# Altium PCB ALTAIR_PD_Squad_V26.5a.PcbDoc (part 1 of 3)
Units mm, origin at the board's own origin, x right, y up, seen from the top; angles counter-clockwise.
Board outline 65 x 52 mm, 4 copper layers (Top Layer, Layer 2, Layer 3, Bottom Layer), stack 1.818 mm thick; 171 components, 122 nets, 540 pads, 371 vias.
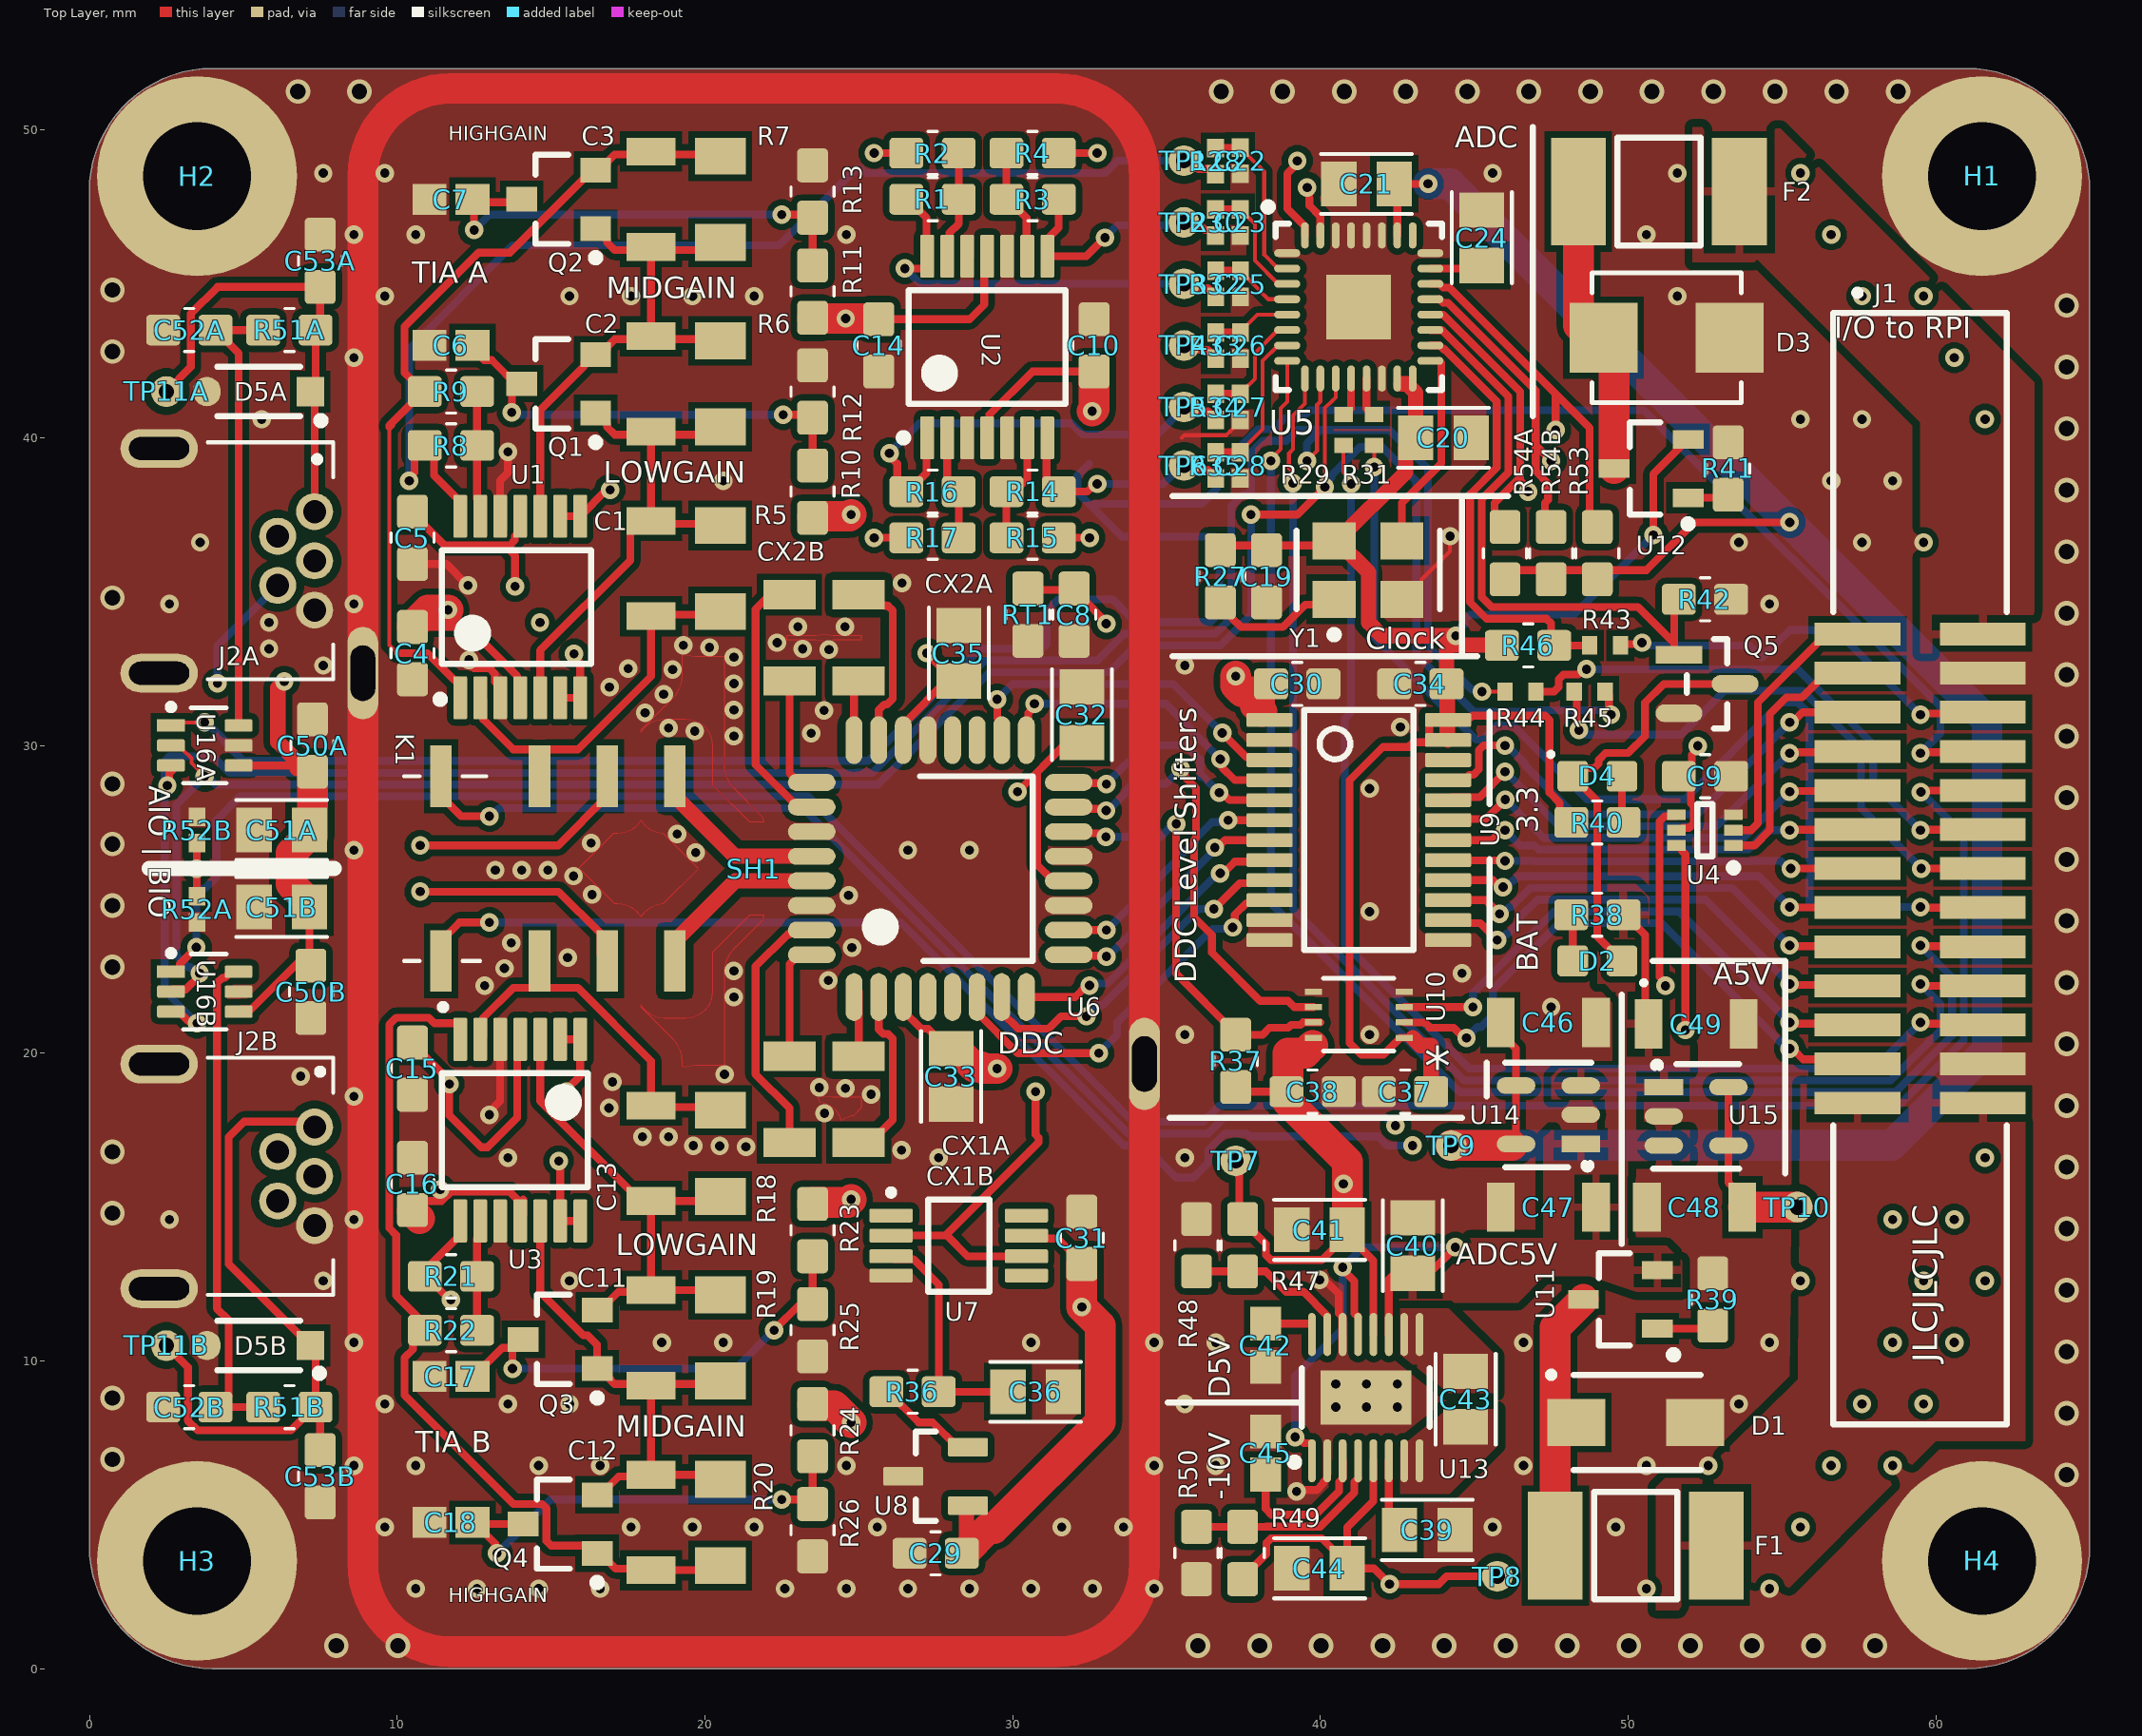
[diagram p0: Top Layer view]
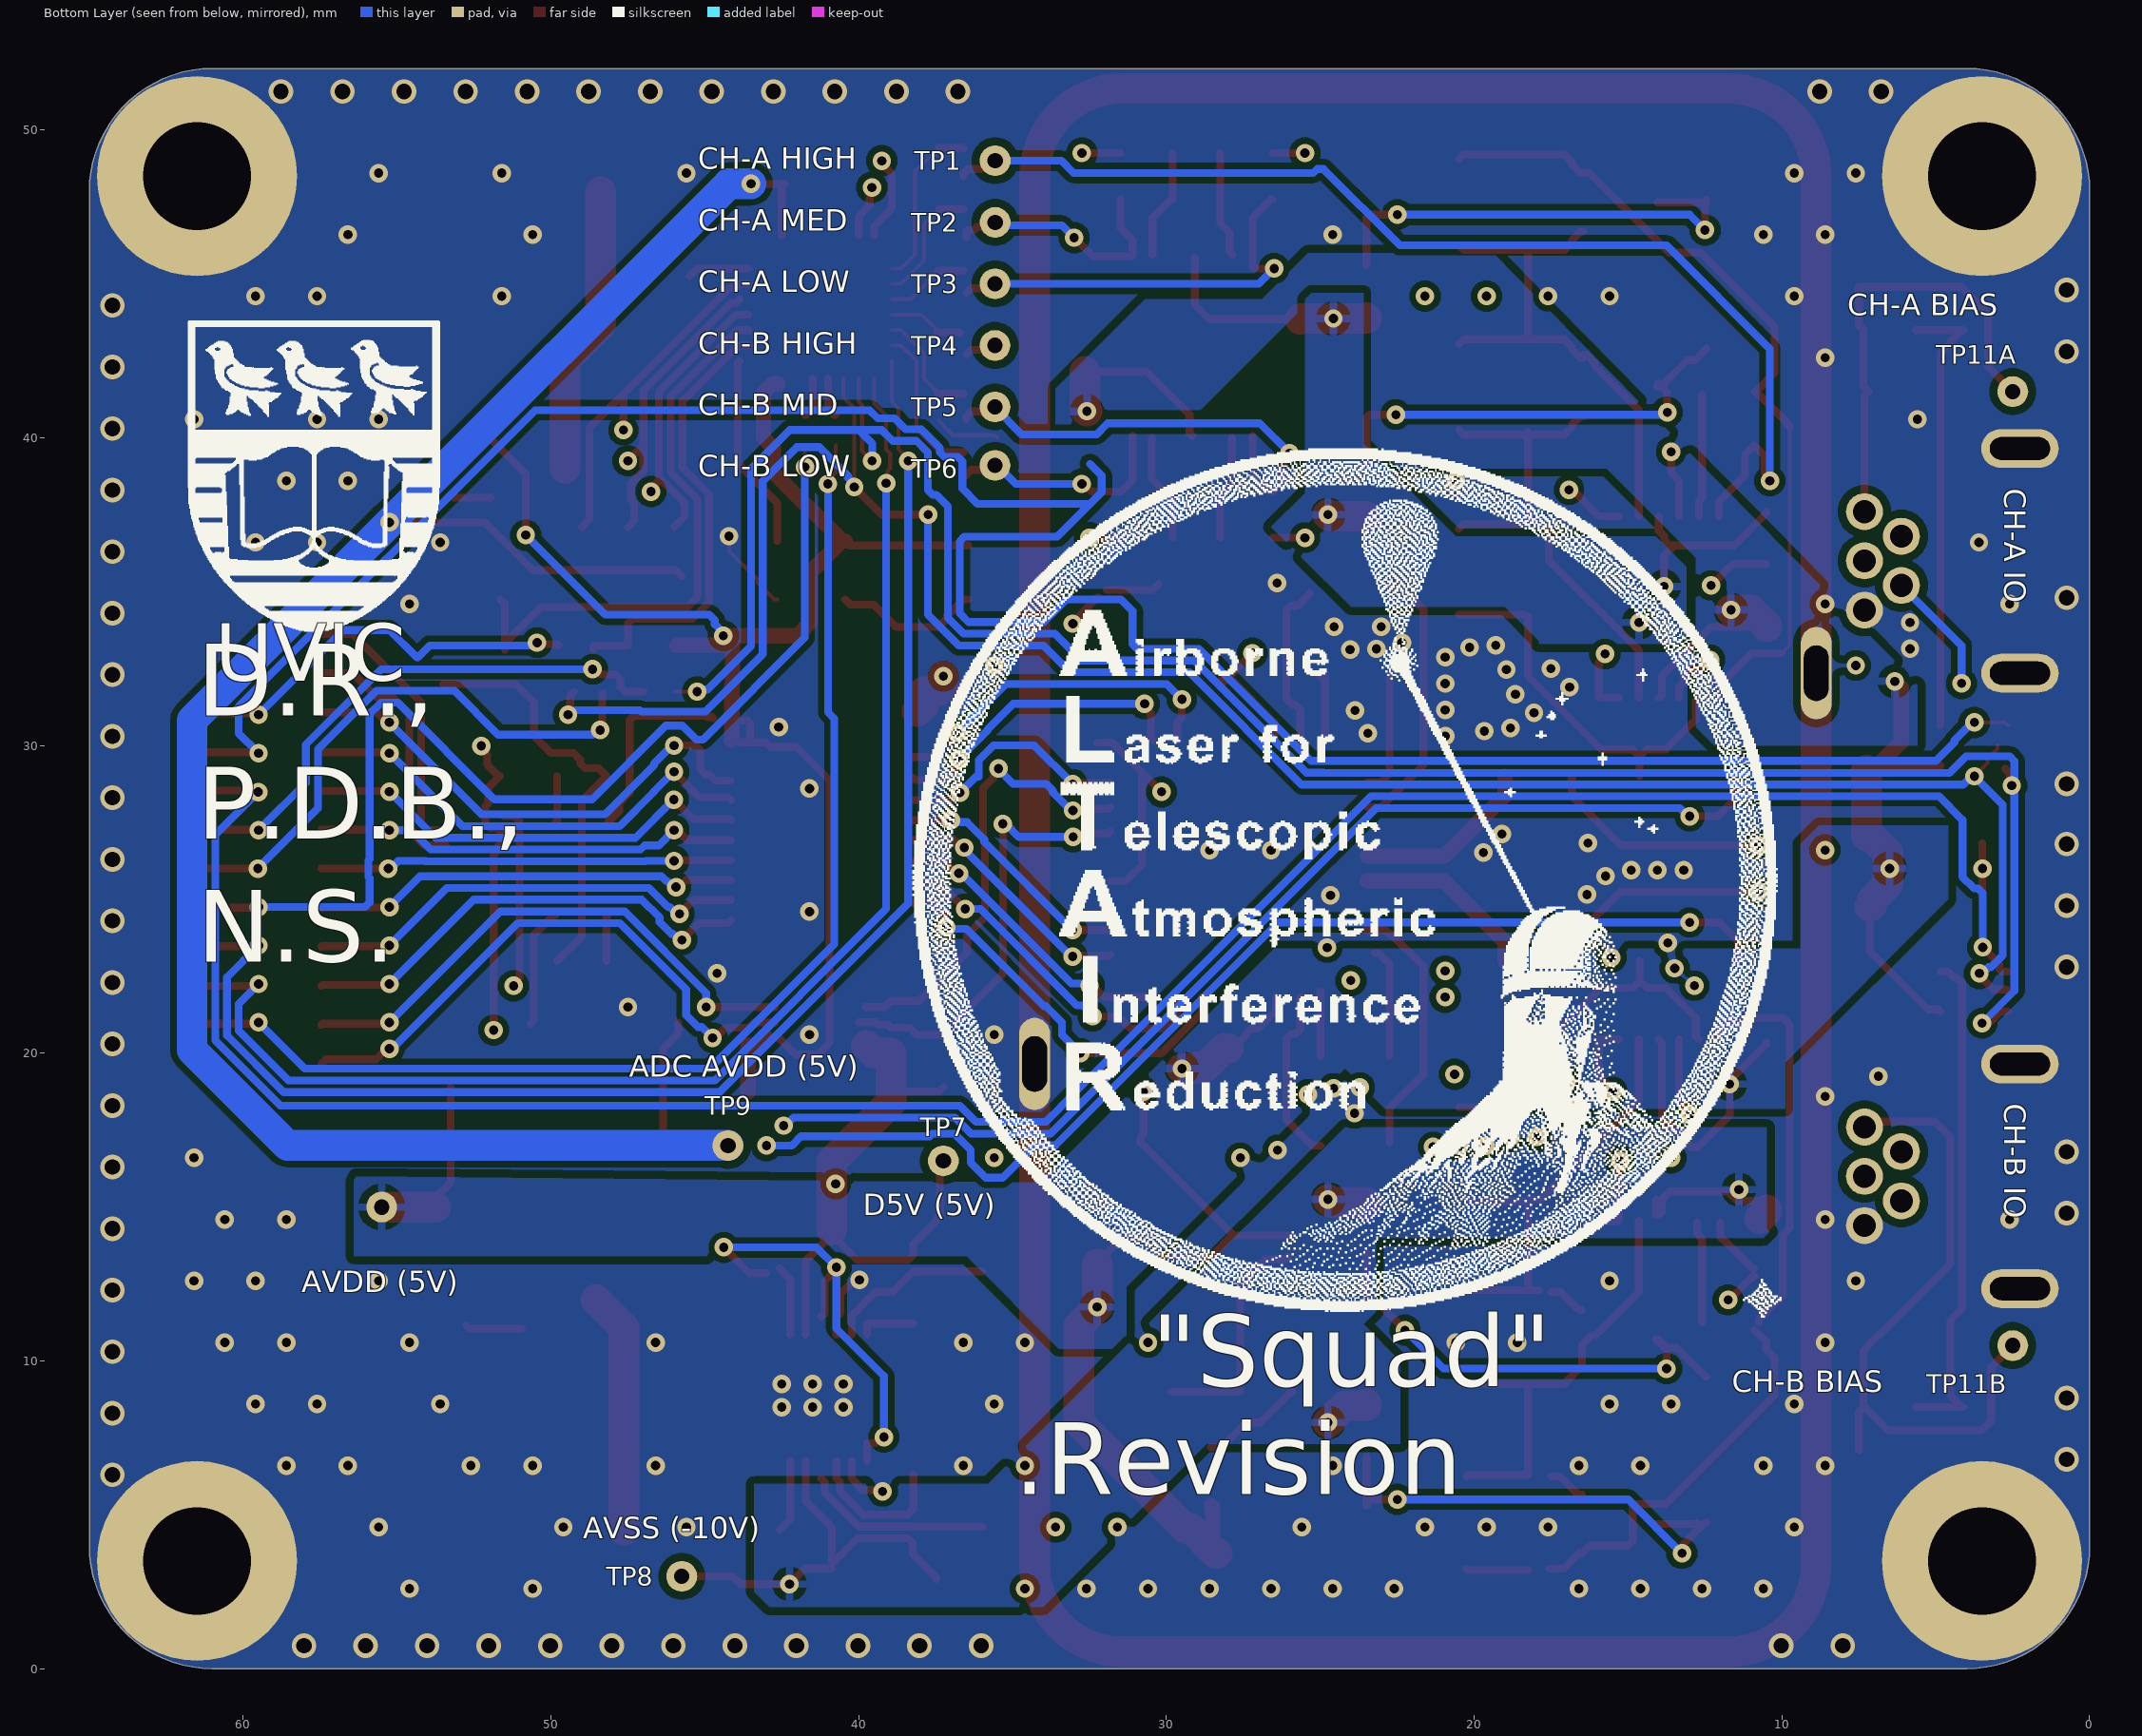
[diagram p1: Bottom Layer view, seen from below]
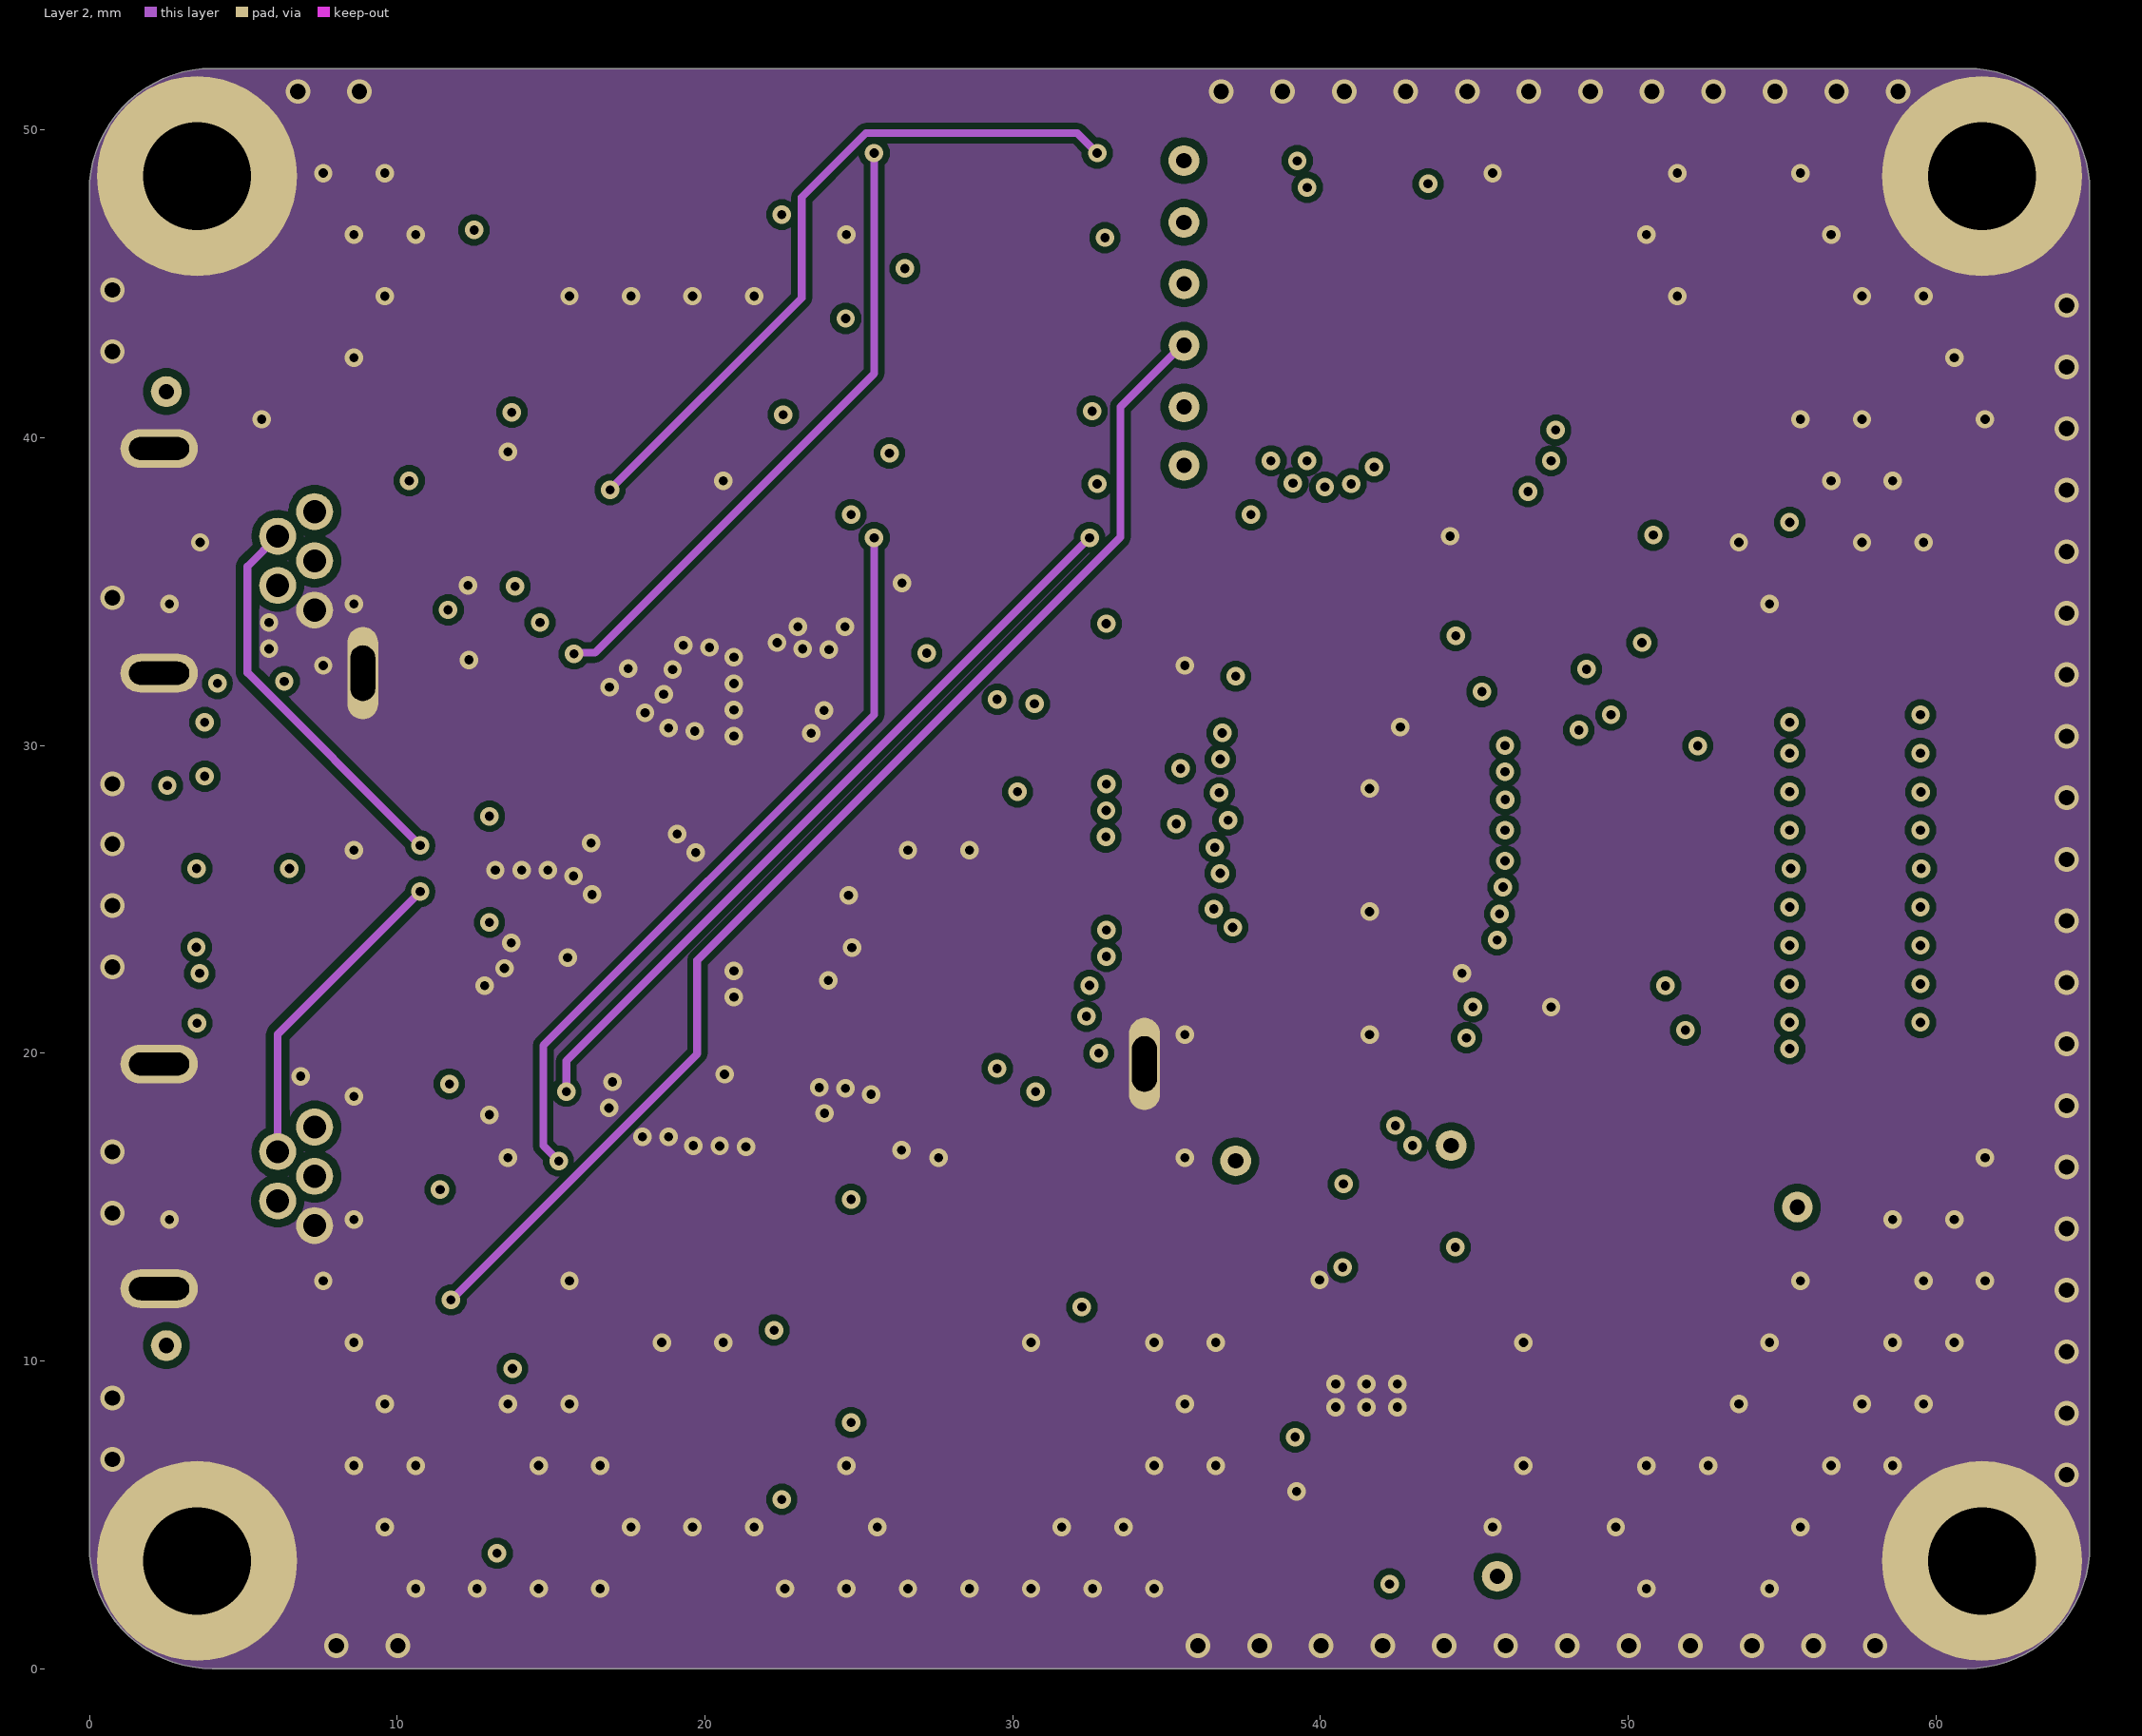
[diagram p2: Layer 2]
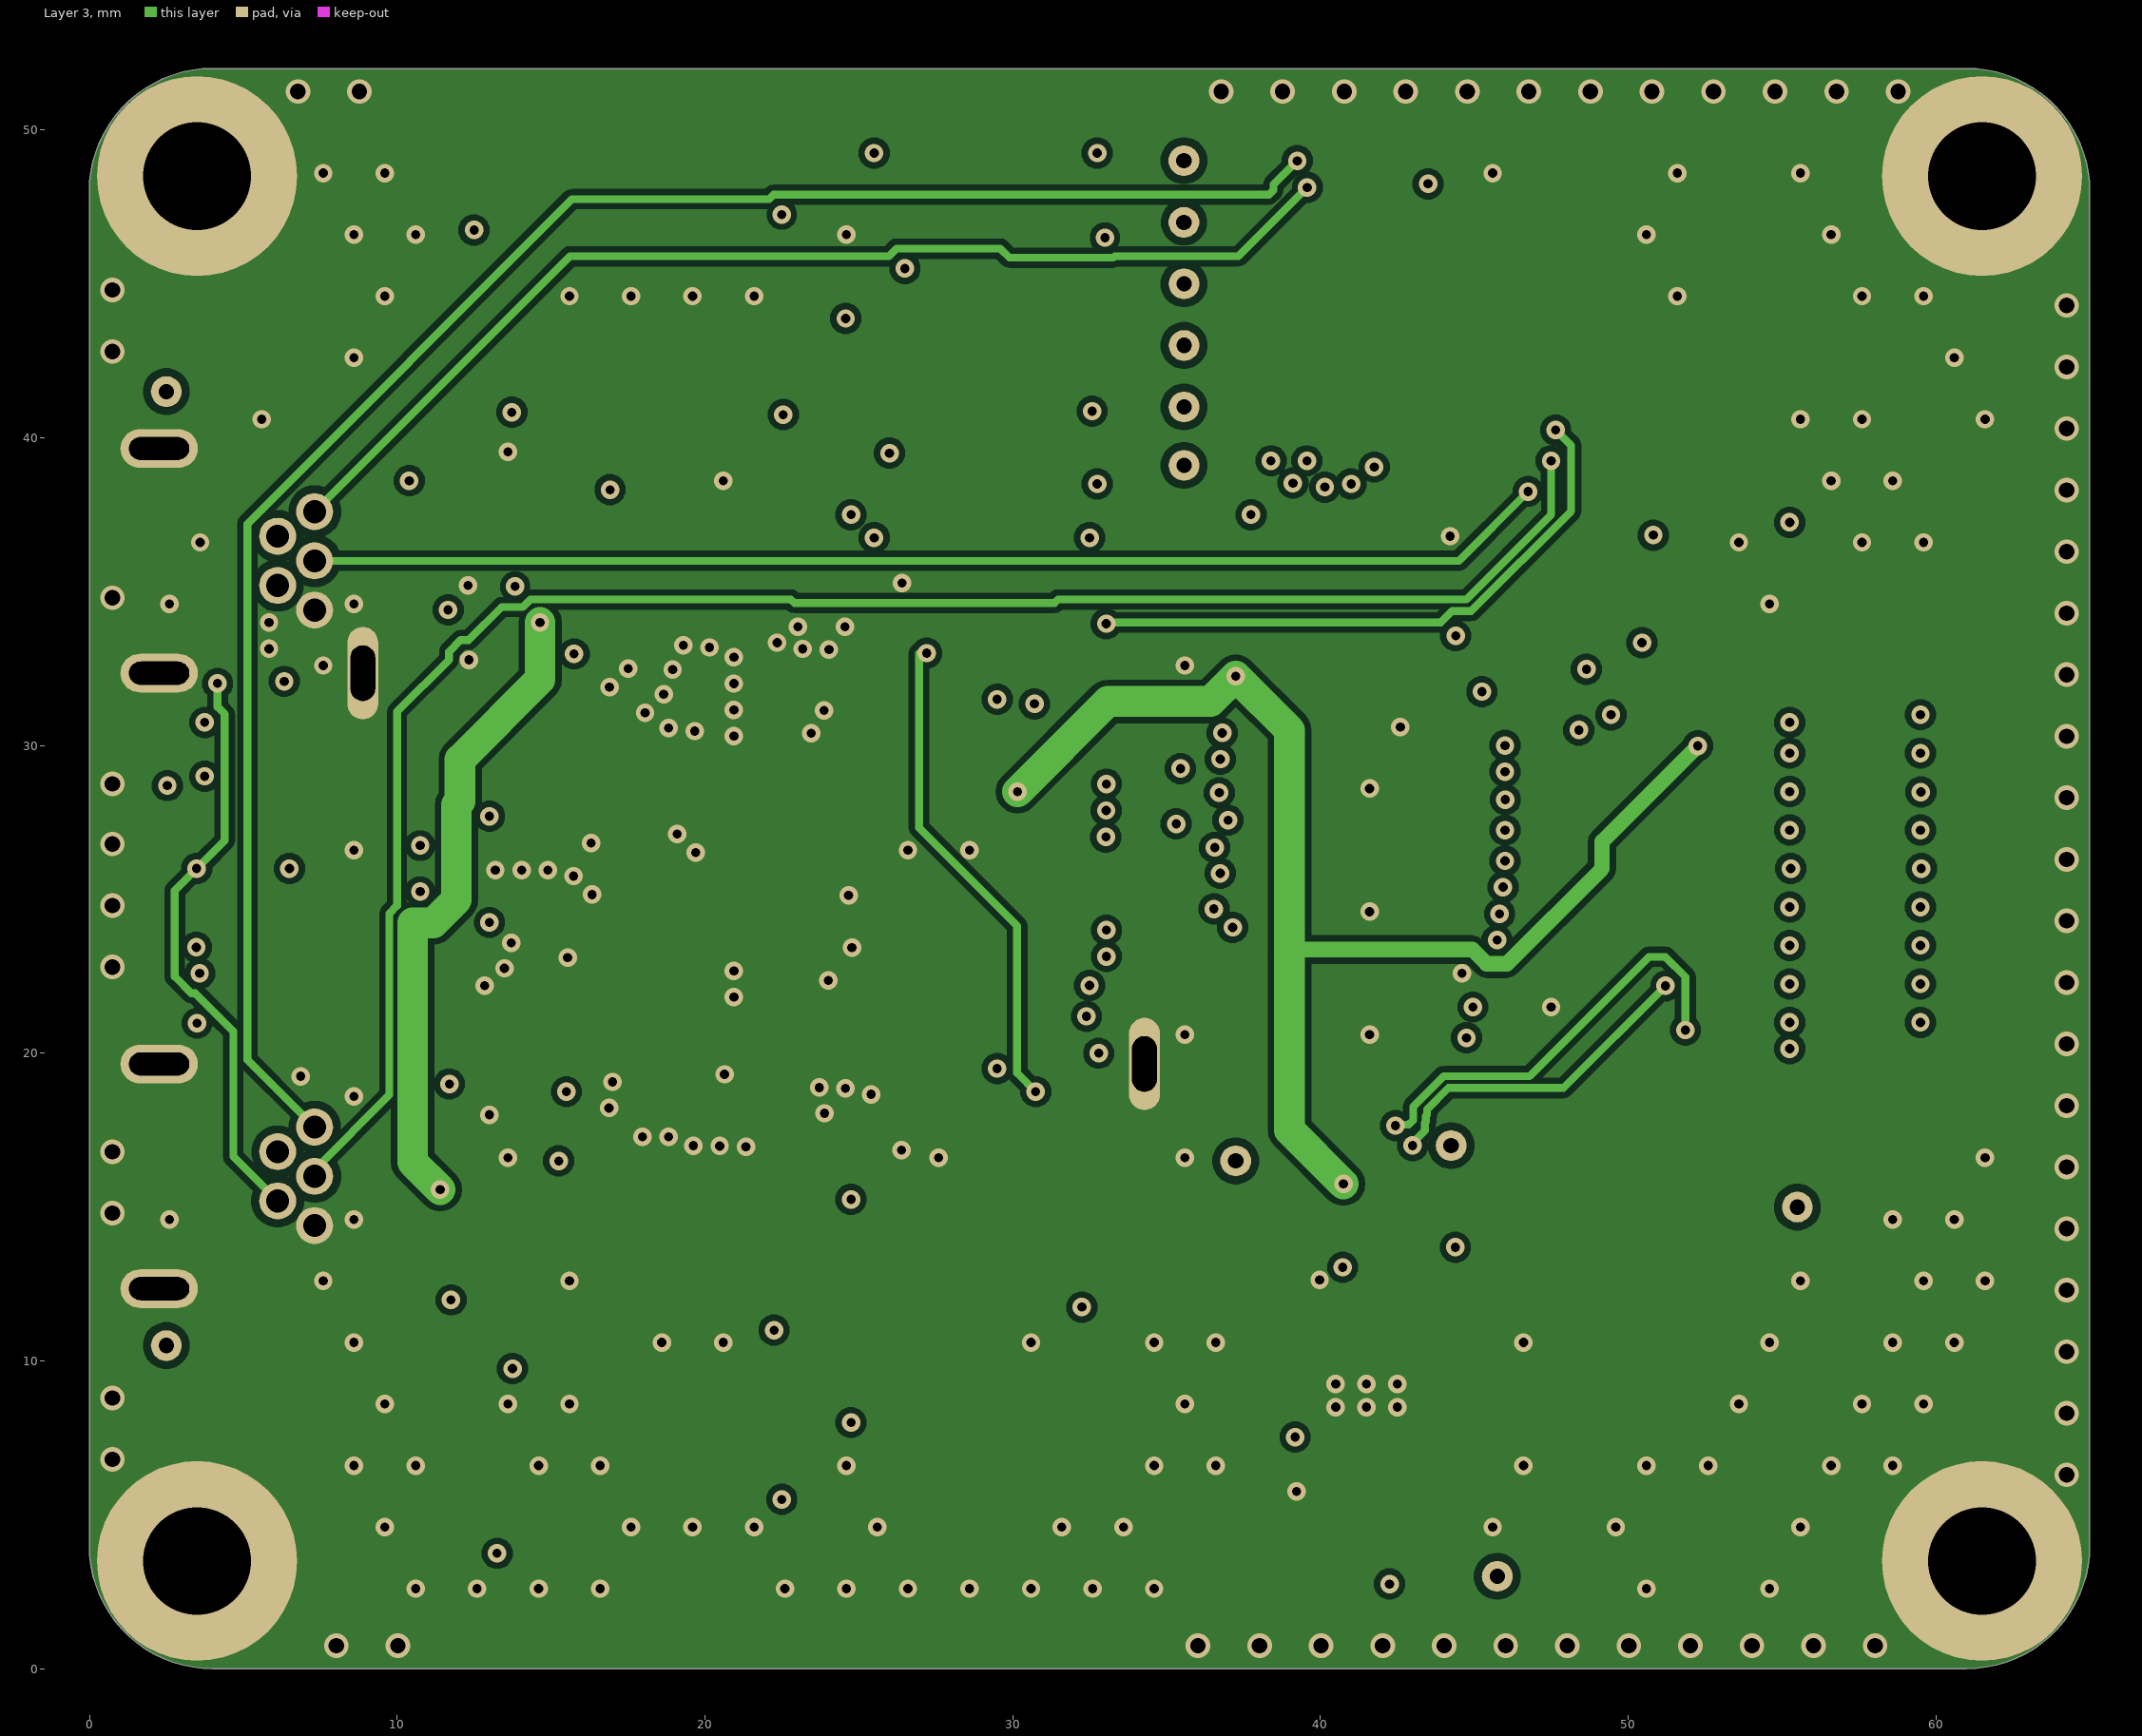
[diagram p3: Layer 3]
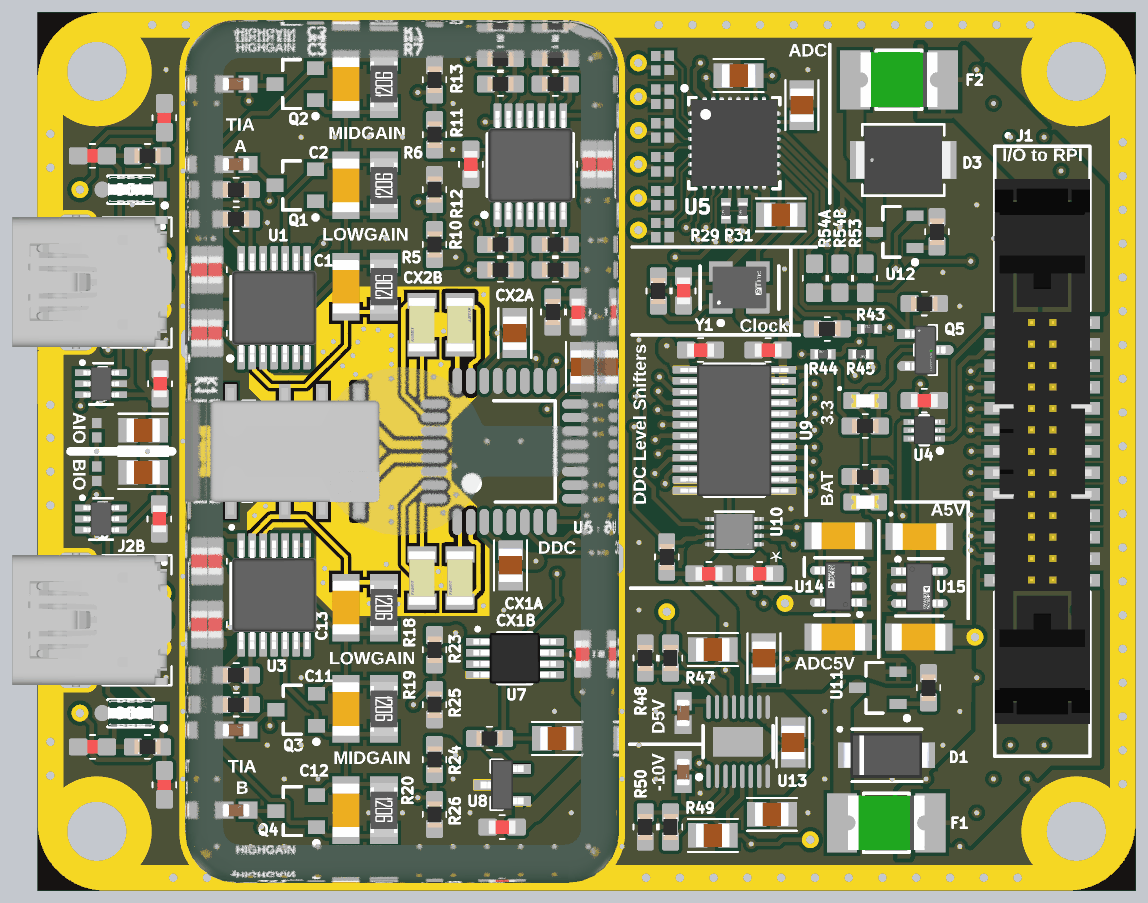
[diagram p5: 3D render of the assembled board from above, using the file's embedded part models]

## Layer stack, top to bottom
Top Solder: solder mask 0.0254, Solder Resist, Dk 3.5
Top Layer: signal copper 0.0356
Dielectric 2: prepreg 0.1702, FR-408, Dk 4.1
Dielectric 4: prepreg 0.0711, PP-006, Dk 4.1
Layer 2: signal copper 0.035
Dielectric 1: core 1.1938, FR-408, Dk 4.8
Layer 3: signal copper 0.035
Dielectric 5: prepreg 0.0711, PP-006, Dk 4.1
Dielectric 3: prepreg 0.1702, FR-408, Dk 4.1
Bottom Layer: signal copper 0.0356
Bottom Solder: solder mask 0.0254, Solder Resist, Dk 3.5

## Board outline
0,4 0,48 cw(c4,48) 4,52 61,52 cw(c61,48) 65,48 65,4 cw(c61,4) 61,0 4,0 cw(c4,4)

## Design rules (kind name [scope] priority, off if disabled: settings)
AssemblyTestPointUsage [All] p1: isadvanced=TRUE
AssemblyTestpoint [All] p1: isadvanced=TRUE testpointundercomponent=TRUE minsize=1.016 maxsize=2.54 preferedsize=1.524 minholesize=0 maxholesize=1.016 preferedholesize=0.813 testpointgrid=0.025 usegrid=TRUE gridtolerance=0 allowsidetop=TRUE allowsidebottom=TRUE
Clearance ViaNotInPad [IsVia vs IsPad and not InPadClass('AllowVia')] p1: isadvanced=TRUE gap=0.152 ignorepadtopadclearanceinfootprint=FALSE
Clearance SoldierGuard [InNamedPolygon('SOLDIER_GUARD_L01_P001')] p2 off: isadvanced=TRUE gap=0.19 ignorepadtopadclearanceinfootprint=FALSE
Clearance UsbGuard [InNamedPolygon('GUARD_L02_P002') or InNamedPolygon('GUARD_L03_P002') or InNamedPolygon('GUARD_LBS_P001')] p3: isadvanced=TRUE gap=0.2 ignorepadtopadclearanceinfootprint=FALSE
Clearance Clearance_3 [InNamedPolygon('SYS_DVDD_L01_P001') or InNamedPolygon('SYS_DVDD_L03_P001')] p4 off: isadvanced=TRUE gap=0.25 ignorepadtopadclearanceinfootprint=FALSE
Clearance Clearance_1 [(ExistsOnLayer('Layer 2') Or ExistsOnLayer('Layer 3')) vs (ExistsOnLayer('Layer 2') Or ExistsOnLayer('Layer 3'))] p5: gap=0.2 ignorepadtopadclearanceinfootprint=TRUE except(0: Arc-Hole Track-Hole SMDPad-Hole THPad-Hole Via-Hole Fill-Hole Poly-Hole Region-Hole Text-Hole; 0.127: Arc-Arc Arc-Track Arc-SMDPad Arc-Text Track-Track Track-SMDPad Track-Text SMDPad-SMDPad SMDPad-Text Text-Text; 0.22: Arc-Via Track-Via Via-Text; 0.254: Arc-THPad Track-THPad SMDPad-THPad SMDPad-Via THPad-THPad THPad-Via THPad-Fill THPad-Poly THPad-Region THPad-Text Via-Via Fill-Fill Fill-Poly Fill-Region Poly-Poly Poly-Region Region-Region Hole-Hole) sourcerule=51 cellrowname=All cellrowtype=0 cellcolname=All cellcoltype=0 innerlayers=TRUE
Clearance Clearance_2 [(ExistsOnLayer('Top Layer') Or ExistsOnLayer('Bottom Layer')) vs (ExistsOnLayer('Top Layer') Or ExistsOnLayer('Bottom Layer'))] p6: gap=0.2 ignorepadtopadclearanceinfootprint=TRUE except(0: Arc-Hole Track-Hole SMDPad-Hole THPad-Hole Via-Hole Fill-Hole Poly-Hole Region-Hole Text-Hole; 0.127: Arc-Arc Arc-Track Arc-SMDPad Arc-Text Track-Track Track-SMDPad Track-Text SMDPad-SMDPad SMDPad-Text Text-Text; 0.22: Arc-Via Track-Via Via-Text; 0.254: Arc-THPad Track-THPad SMDPad-THPad SMDPad-Via THPad-THPad THPad-Via THPad-Fill THPad-Poly THPad-Region THPad-Text Via-Via Fill-Fill Fill-Poly Fill-Region Poly-Poly Poly-Region Region-Region Hole-Hole) sourcerule=51 cellrowname=All cellrowtype=0 cellcolname=All cellcoltype=0 outerlayers=TRUE
Clearance [All] p7: gap=0.254 ignorepadtopadclearanceinfootprint=TRUE ismatrix=TRUE
ComponentClearance [All] p1: isadvanced=TRUE gap=0.254 collisioncheckmode=3 verticalgap=0.254 showdistances=FALSE
FabricationTestPointUsage [All] p1: isadvanced=TRUE valid=0 allowmultiple=FALSE
FabricationTestpoint [All] p1: isadvanced=TRUE side=3 testpointundercomponent=TRUE minsize=1.016 maxsize=2.54 preferedsize=1.524 minholesize=0 maxholesize=1.016 preferedholesize=0.813 testpointgrid=0.025 allowsidetop=TRUE allowsidebottom=TRUE usegrid=TRUE gridtolerance=0
FanoutControl Fanout_BGA [IsBGA] p1: isadvanced=TRUE bgadir=Out bgaviamode=Centered fanoutstyle=Auto fanoutdirection=Alternating viagrid=0.025 // Fanout_BGA (Default Rule)
FanoutControl Fanout_LCC [IsLCC] p2: isadvanced=TRUE bgadir=Out bgaviamode=Centered fanoutstyle=Auto fanoutdirection=Alternating viagrid=0.025 // Fanout_LCC (Default Rule)
FanoutControl Fanout_SOIC [IsSOIC] p3: isadvanced=TRUE bgadir=Out bgaviamode=Centered fanoutstyle=Auto fanoutdirection=Alternating viagrid=0.025 // Fanout_SOIC (Default Rule)
FanoutControl Fanout_Small [(CompPinCount < 5)] p4: isadvanced=TRUE bgadir=Out bgaviamode=Centered fanoutstyle=Auto fanoutdirection=OutThenIn viagrid=0.025 // Fanout_Small (Default Rule)
FanoutControl Fanout_Default [All] p5: isadvanced=TRUE bgadir=Out bgaviamode=Centered fanoutstyle=Auto fanoutdirection=Alternating viagrid=0.025 // Fanout_Default (Default Rule)
Height [All] p1: isadvanced=TRUE minheight=0 maxheight=25.4 prefheight=12.7
HoleSize [All] p1: isadvanced=TRUE absolutevalues=TRUE maxlimit=4 minlimit=0.2 maxpercent=80.000 minpercent=20.000
HoleToHoleClearance [All] p1: isadvanced=TRUE gap=0.407 allowstackedmicrovias=TRUE // From PCBWay Advanced Capabilities
LayerPairs [All] p1: isadvanced=TRUE enforce=TRUE
MinimumSolderMaskSliver [All] p1: isadvanced=TRUE minsoldermaskwidth=0.076 // From PCBWay Advanced Capabilities
NetAntennae [All] p1 off: isadvanced=TRUE netantennaetolerance=0
PasteMaskExpansion [All] p1: isadvanced=TRUE expansion=0
PlaneClearance [All] p1: isadvanced=TRUE clearance=0.508
PlaneConnect [All] p1: isadvanced=TRUE planeconnectstyle=Relief reliefexpansion=0.508 reliefentries=4 reliefconductorwidth=0.254 reliefairgap=0.254
PolygonConnect DirectConnectStructures [InComponent('*H*')] p1: isadvanced=TRUE connectstyle=Direct reliefconductorwidth=0.254 reliefentries=2 polygonreliefangle="0 Angle" airgapwidth=0.254 // Ensure direct connection for holes and shield
PolygonConnect PolygonConnectStyle_DCV [InPolygonClass('DirectConnectVias')] p2: isadvanced=TRUE thpad.connectstyle=Relief thpad.reliefconductorwidth=0.254 thpad.reliefentries=4 thpad.polygonreliefangle="90 Angle" thpad.airgapwidth=0.254 smdpad.connectstyle=Relief smdpad.reliefconductorwidth=0.254 smdpad.reliefentries=4 smdpad.polygonreliefangle="90 Angle" smdpad.airgapwidth=0.254 via.connectstyle=Direct via.reliefconductorwidth=0.254 via.reliefentries=2 via.polygonreliefangle="0 Angle" via.airgapwidth=0.254
PolygonConnect PolygonConnectStyle_DCE [InPolygonClass('DirectConnectEverything')] p3: isadvanced=TRUE connectstyle=Direct reliefconductorwidth=0.254 reliefentries=2 polygonreliefangle="0 Angle" airgapwidth=0.254
PolygonConnect [All] p4: connectstyle=Relief reliefconductorwidth=0.254 reliefentries=4 polygonreliefangle="90 Angle" airgapwidth=0.254
RoutingCorners [All] p1: isadvanced=TRUE cornerstyle=45-Degree minsetback=2.54 maxsetback=2.54
RoutingPriority [All] p1: isadvanced=TRUE routingpriority=0
RoutingVias RoutingViaStyle_3 [All] p1: isadvanced=TRUE holewidth=0.3 width=0.6 viastyle="Through Hole" minholewidth=0.3 minwidth=0.6 maxholewidth=0.711 maxwidth=1.27
RoutingVias [All] p2: holewidth=0.711 width=1.27 viastyle="Through Hole" minholewidth=0.711 minwidth=1.27 maxholewidth=0.711 maxwidth=1.27
ShortCircuit [All] p1: isadvanced=TRUE allowed=FALSE
SilkToSilkClearance [All] p1 off: isadvanced=TRUE silktosilkclearance=0.254
SilkToSolderMaskClearance [IsPad or IsPoly] p1: isadvanced=TRUE minsilkscreentomaskgap=0.15 clearancetoexposedcopper=TRUE
SolderMaskExpansion ExposeGuard [InNet('PD_A')] p1: isadvanced=TRUE expansion=1 istentingtop=FALSE
SolderMaskExpansion [All] p2: isadvanced=TRUE expansion=0 istentingtop=FALSE
SupplyNets "Schematic Supply Nets_12" [InNet('AVDD_ADC')] p1: voltage=0.000
SupplyNets "Schematic Supply Nets_3" [InNet('D5V')] p2: voltage=0.000
SupplyNets "Schematic Supply Nets_8" [InNet('AVSS')] p3: voltage=0.000
SupplyNets "Schematic Supply Nets_10" [InNet('AVDD')] p4: voltage=0.000
SupplyNets "Schematic Supply Nets_5" [InNet('3V3')] p5: isadvanced=TRUE voltage=0.000
SupplyNets "Schematic Supply Nets_2" [InNet('SYS_GND')] p6: isadvanced=TRUE voltage=0.000
UnRoutedNet [All] p1: isadvanced=TRUE
UnpouredPolygon [All] p1: isadvanced=TRUE
Width [All] p1: maxlimit=5 minlimit=0.127 preferedwidth=0.254 midlayer1_minwidth=0.254 midlayer2_minwidth=0.254 minimp=50.000000 maximp=50.000000 favimp=50.000000
4 further rules are at their usual default settings.

## Classes and differential pairs
component class DDC: C29 C30 C31 C32 C33 C34 C35 C36 C37 C38 CX1A CX1B CX2A CX2B R36 R37 U6 U7 U8 U9 U10
component class POWER: C39 C40 C41 C42 C43 C44 C45 C46 C47 C48 C49 R47 R48 R49 R50 TP7 TP8 TP9 TP10 U13 U14 U15
channel class BIAS_IO: A B
component class B: C50B C51B C52B C53B D5B J2B J4_IOB R51B R52B R54B TP11B U16B
component class A: C50A C51A C52A C53A D5A J2A J4_IOA R51A R52A R54A TP11A U16A
component class ADC: C19 C20 C21 C22 C23 C24 C25 C26 C27 C28 R27 R28 R29 R30 R31 R32 R33 R34 R35 TP1 TP2 TP3 TP4 TP5 TP6 U5 Y1
pad class AllowVia: U13-17
polygon class DirectConnectVias: 4V9_L01_P329 L1_VGND
polygon class DirectConnectEverything: Cap1 Cap2 "Layer 2-SYS_GND" SYS_GND_L01_P338 SYS_GND_L02_P346 SYS_GND_L03_P347 SYS_GND_L04_P351 "Top Layer-SYS_GND" "Top Layer-SYS_GND 1" "Top Layer-SYS_GND 2" "Top Layer-SYS_GND 3" "Top Layer-SYS_GND 4" "Top Layer-SYS_GND 5"
component class SWITCH+TIA: C1 C2 C3 C4 C5 C6 C7 C8 C9 C10 C11 C12 C13 C14 C15 C16 C17 C18 K1 Q1 Q2 Q3 Q4 R1 R2 R3 R4 R5 R6 R7 R8 R9 R10 R11 R12 R13 R14 R15 R16 R17 R18 R19 R20 R21 R22 R23 R24 R25 R26 R53 RT1 U1 U2 U3 U4
component class I/O: D1 D2 D3 D4 F1 F2 H1 H2 H3 H4 J1 Q5 R38 R39 R40 R41 R42 R43 R44 R45 R46 SH1 U11 U12

## Components (designator, comment, footprint, x,y, rotation, side; value= is the part's Value field where it differs from the comment)
C1 "20nF" "CAP 1206 UNKNOWN" 18.25,35.75 r270 top
C2 "200pF" "CAP 1206 UNKNOWN" 18.25,41.75 r270 top
C3 "5pF" "CAP 1206 UNKNOWN" 18.25,47.75 r270 top
C4 "1uF" "CAP 0603 IPC MID DENSITY" 10.5,33 r90 top
C5 "1uF" "CAP 0603 IPC MID DENSITY" 10.5,36.75 r90 top
C6 "10pF" "CAP 0603 IPC MID DENSITY MURATA" 11.75,43 r0 top
C7 "10pF" "CAP 0603 IPC MID DENSITY MURATA" 11.75,47.75 r0 top
C8 "0.1uF" "CAP 0603 IPC MID DENSITY" 32,34.25 r90 top
C9 "0.1uF" "CAP 0603 IPC MID DENSITY" 52.5,29 r180 top
C10 "1uF" "CAP 0603 IPC MID DENSITY" 32.65,43 r270 top
C11 "200pF" "CAP 1206 UNKNOWN" 18.25,10.75 r90 top
C12 "5pF" "CAP 1206 UNKNOWN" 18.25,4.75 r90 top
C13 "20nF" "CAP 1206 UNKNOWN" 18.25,16.75 r90 top
C14 "1uF" "CAP 0603 IPC MID DENSITY" 25.65,43 r90 top
C15 "1uF" "CAP 0603 IPC MID DENSITY" 10.5,19.5 r90 top
C16 "1uF" "CAP 0603 IPC MID DENSITY" 10.5,15.75 r270 top
C17 "10pF" "CAP 0603 IPC MID DENSITY MURATA" 11.75,9.5 r0 top
C18 "10pF" "CAP 0603 IPC MID DENSITY MURATA" 11.75,4.75 r0 top
C19 "0.1uF" "CAP 0603 IPC MID DENSITY" 38.25,35.5 r90 top
C20 "10uF" "CAP 0805 IPC MID DENSITY" 44,40 r180 top
C21 "10uF" "CAP 0805 IPC MID DENSITY" 41.5,48.25 r0 top
C22 "2nF" "RES 0402 IPC MID DENSITY" 37.4,49 r90 top
C23 "2nF" "RES 0402 IPC MID DENSITY" 37.4,47 r90 top
C24 "10uF" "CAP 0805 IPC MID DENSITY" 45.25,46.5 r270 top
C25 "2nF" "RES 0402 IPC MID DENSITY" 37.404,45 r90 top
C26 "2nF" "RES 0402 IPC MID DENSITY" 37.404,43 r90 top
C27 "2nF" "RES 0402 IPC MID DENSITY" 37.4,41 r90 top
C28 "2nF" "RES 0402 IPC MID DENSITY" 37.4,39.1 r90 top
C29 "0.1uF" "CAP 0603 IPC MID DENSITY" 27.5,3.75 r0 top
C30 "0.1uF" "CAP 0603 IPC MID DENSITY" 39.25,32 r0 top
C31 "0.1uF" "CAP 0603 IPC MID DENSITY" 32.25,14 r270 top
C32 "10uF" "CAP 0805 IPC MID DENSITY" 32.25,31 r90 top
C33 "10uF" "CAP 0805 IPC MID DENSITY" 28,19.25 r270 top
C34 "0.1uF" "CAP 0603 IPC MID DENSITY" 43.25,32 r180 top
C35 "10uF" "CAP 0805 IPC MID DENSITY" 28.25,33 r90 top
C36 "10uF" "CAP 0805 IPC MID DENSITY" 30.75,9 r0 top
C37 "0.1uF" "CAP 0603 IPC MID DENSITY" 42.75,18.75 r180 top
C38 "0.1uF" "CAP 0603 IPC MID DENSITY" 39.75,18.75 r0 top
C39 "4.7uF" "CAP 0805 IPC MID DENSITY" 43.475,4.509 r180 top
C40 "10uF" "CAP 0805 IPC MID DENSITY" 43,13.75 r270 top
C41 "4.7uF" "CAP 0805 IPC MID DENSITY" 39.975,14.259 r0 top
C42 "10nF" "CAP 0603 IPC MID DENSITY MURATA" 38.225,10.509 r90 top
C43 "1uF" "CAP 0805 IPC MID DENSITY" 44.725,8.759 r90 top
C44 "10uF" "CAP 0805 IPC MID DENSITY" 39.975,3.259 r0 top
C45 "10nF" "CAP 0603 IPC MID DENSITY MURATA" 38.225,7.009 r270 top
C46 "2.2uF" "CAP 1206 UNKNOWN" 47.41,21 r0 top
C47 "2.2uF" "CAP 1206 UNKNOWN" 47.41,15 r180 top
C48 "2.2uF" "CAP 1206 UNKNOWN" 52.16,15 r180 top
C49 "2.2uF" "CAP 1206 UNKNOWN" 52.21,20.95 r0 top
C50A "0.1uF" "CAP 0603 IPC MID DENSITY" 7.25,30 r270 top (schematic designator C50)
C50B "0.1uF" "CAP 0603 IPC MID DENSITY" 7.2,22 r90 top (schematic designator C50)
C51A "10uF" "CAP 0805 IPC MID DENSITY" 6.25,27.25 r0 top (schematic designator C51)
C51B "10uF" "CAP 0805 IPC MID DENSITY" 6.25,24.75 r0 top (schematic designator C51)
C52A "TBD OPT" "CAP 0603 IPC MID DENSITY" 3.25,43.5 r0 top (schematic designator C52)
C52B "TBD OPT" "CAP 0603 IPC MID DENSITY" 3.25,8.5 r0 top (schematic designator C52)
C53A "TBD OPT" "CAP 0603 IPC MID DENSITY" 7.5,45.75 r270 top (schematic designator C53)
C53B "TBD OPT" "CAP 0603 IPC MID DENSITY" 7.5,6.25 r90 top (schematic designator C53)
CX1A "270pF" "CAP 1206 NON-IPC KEMET NP0" 25,18.5 r90 top
CX1B "270pF" "CAP 1206 NON-IPC KEMET NP0" 22.75,18.5 r90 top
CX2A "270pF" "CAP 1206 NON-IPC KEMET NP0" 25,33.5 r270 top
CX2B "270pF" "CAP 1206 NON-IPC KEMET NP0" 22.75,33.5 r90 top
D1 "SMAJ12A" "DO-214AC SMA VISHAY" 50.25,8 r0 top
D2 "RED" "LED 0603 MID DENSITY" 49,23 r0 top
D3 "SMLVT3V3" SMB_STM 51.25,43.25 r0 top
D4 "RED" "LED 0603 MID DENSITY" 49,29 r180 top
D5A "MMSZ4679 DNP" "SOD-123 ONSEMI SMALL PADS" 5.5,41.5 r180 top (schematic designator D5)
D5B "MMSZ4679 DNP" "SOD-123 ONSEMI SMALL PADS" 5.5,10.5 r180 top (schematic designator D5)
F1 "0ZCG0030FF2C" "POLYFUSE 1812 NON-IPC BELFUSE" 50.25,4 r180 top
F2 "0ZCG0030FF2C" "POLYFUSE 1812 NON-IPC BELFUSE" 51,48 r180 top
H1 "Mount-hole" "M3 PTH FOR 4.5MM HEX" 61.5,48.5 r0 top
H2 "Mount-hole" "M3 PTH FOR 4.5MM HEX" 3.5,48.5 r0 top
H3 "Mount-hole" "M3 PTH FOR 4.5MM HEX" 3.5,3.5 r0 top
H4 "Mount-hole" "M3 PTH FOR 4.5MM HEX" 61.5,3.5 r0 top
J1 "FTSH-113-01-L-DV-EJ-K" SAMTEC_FTSH-113-01-L-DV-EJ-K 59.488,26 r270 top
J2A "USB-miniB" USB_MINIB_RIGHTANGLE 2.268,36 r270 top (schematic designator J2)
J2B "USB-miniB" USB_MINIB_RIGHTANGLE 2.268,16 r270 top (schematic designator J2)
K1 "3-1462037-1" RELAY_3-1462037-1 15.227,26 r90 top
Q1 "2SK3557-6-TB-E" ONSC-CP-3-318AN_A_V 15.25,41.75 r180 top
Q2 "2SK3557-6-TB-E" ONSC-CP-3-318AN_A_V 15.25,47.75 r180 top
Q3 "2SK3557-6-TB-E" ONSC-CP-3-318AN_A_V 15.3,10.7 r180 top
Q4 "2SK3557-6-TB-E" ONSC-CP-3-318AN_A_V 15.3,4.7 r180 top
Q5 "BSS138" FP-318-08-IPC_B 52.566,32 r0 top
R1 "10k" "RES 0603 IPC MID DENSITY" 27.4,47.75 r180 top
R2 "10k" "RES 0603 IPC MID DENSITY" 27.4,49.25 r0 top
R3 "10k" "RES 0603 IPC MID DENSITY" 30.65,47.75 r0 top
R4 "10k" "RES 0603 IPC MID DENSITY" 30.65,49.25 r180 top
R5 "1k" "RES 1206 IPC MID DENSITY" 20.5,35.75 r90 top
R6 "100k" "RES 1206 IPC MID DENSITY" 20.5,41.75 r90 top
R7 "5M" "RES 1206 IPC MID DENSITY" 20.5,47.75 r90 top
R8 "10k" "RES 0603 IPC MID DENSITY" 11.75,39.75 r180 top
R9 "10k" "RES 0603 IPC MID DENSITY" 11.75,41.5 r0 top
R10 "10k" "RES 0603 IPC MID DENSITY" 23.5,38.25 r270 top
R11 "10k" "RES 0603 IPC MID DENSITY" 23.5,44.75 r270 top
R12 "13k" "RES 0603 IPC MID DENSITY" 23.5,41.5 r270 top
R13 "13k" "RES 0603 IPC MID DENSITY" 23.5,48 r270 top
R14 "10k" "RES 0603 IPC MID DENSITY" 30.65,38.25 r0 top
R15 "10k" "RES 0603 IPC MID DENSITY" 30.65,36.75 r180 top
R16 "10k" "RES 0603 IPC MID DENSITY" 27.4,38.25 r180 top
R17 "10k" "RES 0603 IPC MID DENSITY" 27.4,36.75 r0 top
R18 "1k" "RES 1206 IPC MID DENSITY" 20.5,16.75 r270 top
R19 "100k" "RES 1206 IPC MID DENSITY" 20.5,10.75 r270 top
R20 "5M" "RES 1206 IPC MID DENSITY" 20.5,4.75 r270 top
R21 "10k" "RES 0603 IPC MID DENSITY" 11.75,12.75 r180 top
R22 "10k" "RES 0603 IPC MID DENSITY" 11.75,11 r0 top
R23 "10k" "RES 0603 IPC MID DENSITY" 23.5,14.25 r90 top
R24 "10k" "RES 0603 IPC MID DENSITY" 23.5,7.75 r90 top
R25 "13k" "RES 0603 IPC MID DENSITY" 23.5,11 r90 top
R26 "13k" "RES 0603 IPC MID DENSITY" 23.5,4.5 r90 top
R27 "10k" "RES 0603 IPC MID DENSITY" 36.75,35.5 r90 top
R28 "2k" "RES 0402 IPC MID DENSITY" 36.596,48.983 r90 top
R29 "47R" "RES 0402 NON-IPC SEI" 40.75,40.25 r270 top
R30 "2k" "RES 0402 IPC MID DENSITY" 36.596,47 r90 top
R31 "47R" "RES 0402 NON-IPC SEI" 41.75,40.25 r270 top
R32 "2k" "RES 0402 IPC MID DENSITY" 36.6,45 r90 top
R33 "2k" "RES 0402 IPC MID DENSITY" 36.6,43 r90 top
R34 "2k" "RES 0402 IPC MID DENSITY" 36.6,41 r90 top
R35 "2k" "RES 0402 IPC MID DENSITY" 36.6,39.1 r90 top
R36 "10k" "RES 0603 IPC MID DENSITY" 26.75,9 r180 top
R37 "10k" "RES 0603 IPC MID DENSITY" 37.25,19.75 r270 top
R38 "11k" "RES 0603 IPC MID DENSITY" 49,24.5 r0 top
R39 "1k" "RES 0603 IPC MID DENSITY" 52.75,12 r270 top
R40 "1k" "RES 0603 IPC MID DENSITY" 49,27.5 r180 top
R41 "1k" "RES 0603 IPC MID DENSITY" 53.25,39 r270 top
R42 "100k" "RES 0603 IPC MID DENSITY" 52.5,34.75 r180 top
R43 "47R" "RES 0402 NON-IPC SEI" 48.75,31.75 r0 top
R44 "47R" "RES 0402 NON-IPC SEI" 46.5,31.75 r180 top
R45 "47R" "RES 0402 NON-IPC SEI" 49.25,33.25 r180 top
R46 "10k" "RES 0603 IPC MID DENSITY" 46.75,33.25 r0 top
R47 "330k" "RES 0603 IPC MID DENSITY" 37.475,13.759 r90 top
R48 "100k" "RES 0603 IPC MID DENSITY" 35.975,13.759 r270 top
R49 "750k" "RES 0603 IPC MID DENSITY" 37.475,3.759 r270 top
R50 "100k" "RES 0603 IPC MID DENSITY" 35.975,3.759 r90 top
R51A "TBD" "RES 0603 IPC MID DENSITY" 6.5,43.5 r180 top (schematic designator R51)
R51B "TBD" "RES 0603 IPC MID DENSITY" 6.5,8.5 r180 top (schematic designator R51)
R52A "0" "RES 0402 IPC MID DENSITY" 3.5,24.675 r270 top (schematic designator R52)
R52B "0" "RES 0402 IPC MID DENSITY" 3.5,27.25 r90 top (schematic designator R52)
R53 "10K OPT" "RES 0603 IPC MID DENSITY" 49,36.25 r90 top
R54A "10K OPT" "RES 0603 IPC MID DENSITY" 46,36.25 r90 top (schematic designator R54)
R54B "10K OPT" "RES 0603 IPC MID DENSITY" 47.5,36.25 r90 top (schematic designator R54)
RT1 "NTC 0603 10K 1%" "RES 0603 IPC MID DENSITY" 30.5,34.25 r90 top value="NT 10K"
SH1 "Mount-hole" MS511-10 21.585,26 r90 top locked
TP1 "Testpoint" "TESTPOINT THT" 35.567,49.003 r90 top
TP2 "Testpoint" "TESTPOINT THT" 35.567,47 r90 top
TP3 "Testpoint" "TESTPOINT THT" 35.571,45 r90 top
TP4 "Testpoint" "TESTPOINT THT" 35.571,43 r90 top
TP5 "Testpoint" "TESTPOINT THT" 35.571,41 r90 top
TP6 "Testpoint" "TESTPOINT THT" 35.571,39.1 r90 top
TP7 "Testpoint" "TESTPOINT THT" 37.25,16.5 r90 top
TP8 "Testpoint" "TESTPOINT THT" 45.75,3 r90 top
TP9 "Testpoint" "TESTPOINT THT" 44.25,17 r90 top
TP10 "Testpoint" "TESTPOINT THT" 55.5,15 r90 top
TP11A "Testpoint" "TESTPOINT THT" 2.5,41.5 r90 top (schematic designator TP11)
TP11B "Testpoint" "TESTPOINT THT" 2.5,10.5 r90 top (schematic designator TP11)
U1 "OPA4140AIPW" PW0014A_N 14,34.5 r90 top
U2 "OPA4140AIPW" PW0014A_N 29.177,42.949 r90 top
U3 "OPA4140AIPW" PW0014A_N 14,17.5 r270 top
U4 "DRV8210DRLR" SOT563 52.5,27.25 r180 top
U5 "ADS124S08IRHBT" QFN50P500X500X100_HS-33L 41.25,44.25 r0 top
U6 "DDC112YK/250G4" TI-PJT32_N 27.647,26 r90 top
U7 "OPA350" "8VSSOP LOW DENSITY TI" 28.25,13.75 r0 top
U8 "REF3040E" "SOT23-3 MID DENSITY TI" 27.5,6.25 r180 top
U9 "SN74LVC4245A" "24TSSOP LOW DENSITY TI" 41.25,27.25 r0 top
U10 "SN74LVC2T45" DCU8-L 41.25,21.25 r180 top
U11 "SI2347DS-T1-GE3" SOT95P245X110-3N 49.75,12 r180 top
U12 "SSM3J332R,LF" SOT95P245X110-3N 50.75,39 r180 top
U13 "LTC3260MPMSE#TRPBF" LT-MSE-16-EDP_L 41.475,8.809 r90 top
U14 "ADP7142AUJZ-5.0-R7" "SOT23-5 HIGH DENSITY AD" 47.41,18 r180 top
U15 "ADP7142AUJZ-5.0-R7" "SOT23-5 HIGH DENSITY AD" 52.21,17.95 r0 top
U16A "DAC5311" "SOT363-6 MID DENSITY" 3.75,30 r0 top (schematic designator U16)
U16B "DAC5311" "SOT363-6 MID DENSITY" 3.75,22 r0 top (schematic designator U16)
Y1 "SIT1602Bx" "4PQFN NON-IPC SITIME" 41.546,35.7 r90 top

## Footprints (in the part's own frame and the unit in brackets; to place one, negate y for a bottom-side part, rotate by r counter-clockwise, add the part's x,y. Pads: shape width x height; smd on the part's side, far side on the other; paste and mask are expansions set on the pad)
"4PQFN NON-IPC SITIME" [mm] "FP-SiT1602-2-MFG"
  rect 1.2x1.4 smd paste+0 mask+0: 1(-0.95,1.1) 2(-0.95,-1.1) 3(0.95,-1.1) 4(0.95,1.1)
  silkscreen extent -2.22,-2.34 1.28,2.32, body extent -1.65,-1.9 1.65,1.9, height 0.25
"8VSSOP LOW DENSITY TI" [mm]
  rrect22% 1.4x0.45 smd mask+0.025: 1(-2.2,0.975) 2(-2.2,0.325) 3(-2.2,-0.35) 4(-2.2,-0.975) 5(2.2,-0.975) 6(2.2,-0.35) 7(2.2,0.325) 8(2.2,0.975)
  silkscreen extent -2.27,-1.5 1,1.8, body extent -2.45,-1.5 2.45,1.5, height 1.1
"24TSSOP LOW DENSITY TI" [mm] "Reference document: PW0024A"
  rrect22% 1.5x0.45 smd mask+0.025: 1(-2.9,3.575) 2(-2.9,2.925) 3(-2.9,2.275) 4(-2.9,1.625) 5(-2.9,0.975) 6(-2.9,0.325) 7(-2.9,-0.325) 8(-2.9,-0.975) 9(-2.9,-1.625) 10(-2.9,-2.275) 11(-2.9,-2.925) 12(-2.9,-3.575) 13(2.9,-3.575) 14(2.9,-2.925) 15(2.9,-2.275) 16(2.9,-1.625) 17(2.9,-0.975) 18(2.9,-0.325) 19(2.9,0.325) 20(2.9,0.975) 21(2.9,1.625) 22(2.9,2.275) 23(2.9,2.925) 24(2.9,3.575)
  silkscreen extent -1.78,-3.9 1.78,3.9, body extent -3.2,-3.9 3.2,3.9, height 1.13
"CAP 0603 IPC MID DENSITY" [mm]
  rrect25% 1.1x1 smd: 1(-0.85,0) 2(0.85,0)
  silkscreen extent -0.15,-0.7 0.15,0.7, body extent -0.8,-0.4 0.8,0.4, height 0.3
"CAP 0603 IPC MID DENSITY MURATA" [mm]
  rect 1.105x1.006 smd paste+0 mask+0: 1(-0.701,0) 2(0.701,0)
  body extent -1.5,-0.75 1.5,0.75, height 0.25
"CAP 0805 IPC MID DENSITY" [mm]
  rect 1.15x1.45 smd paste+0 mask+0: 1(-0.9,0) 2(0.9,0)
  silkscreen extent -1.48,-0.97 1.48,0.97, body extent -1,-0.7 1,0.7, height 1.22
"CAP 1206 NON-IPC KEMET NP0" [mm]
  rect 0.95x1.7 smd paste+0 mask+0: 1(-1.4,0) 2(1.4,0)
  body extent -2,-1 2,1, height 0.25
"CAP 1206 UNKNOWN" [mm] "Ceramic Capacitors, body 3.2x1.6mm, WCAP-CSGP_1206_L3.2W1.6H0.8"
  rect 0.9x1.6 smd: 1(-1.55,0) 2(1.55,0)
  body extent -1.6,-0.8 1.6,0.8, height 0.8
DCU8-L [mm]
  rect 0.556x0.204 smd paste+0 mask+0: 1(-1.472,0.75) 2(-1.472,0.25) 3(-1.472,-0.25) 4(-1.472,-0.75) 5(1.472,-0.75) 6(1.472,-0.25) 7(1.472,0.25) 8(1.472,0.75)
  silkscreen extent -1.14,-1.18 1.14,1.18, body extent -1.6,-1.05 1.6,1.05, height 0.89
"DO-214AC SMA VISHAY" [mm]
  rect 1.88x1.52 smd mask+0: 1(-1.93,0) 2(1.93,0)
  silkscreen extent -2.82,-1.55 2.1,1.62, body extent -2.55,-1.33 2.55,1.33, height 2.29
FP-318-08-IPC_B [mm]
  rect 1.524x0.578 smd paste+0 mask+0: 1(-0.91,0.95)
  rrect100% 1.524x0.578 smd paste+0 mask+0: 2(-0.91,-0.95) 3(0.91,0)
  silkscreen extent -0.65,-1.45 0.65,1.45, body extent -1.92,-1.7 1.92,1.7, height 0.25
"LED 0603 MID DENSITY" [mm]
  rrect25% 1x1 smd: 1(0.8,0) 2(-0.8,0)
  silkscreen extent 1.46,-0.76 1.56,-0.66, body extent -0.8,-0.4 0.8,0.4, height 0.7
LT-MSE-16-EDP_L [mm] "SOP, 16-Leads, Body 4.1x3.1mm, Pitch 0.5mm, Thermal Pad 2.95x1.76mm, IPC High Density"
  oval 1.4x0.25 smd: 1(-2.05,1.75) 2(-2.05,1.25) 3(-2.05,0.75) 4(-2.05,0.25) 5(-2.05,-0.25) 6(-2.05,-0.75) 7(-2.05,-1.25) 8(-2.05,-1.75) 9(2.05,-1.75) 10(2.05,-1.25) 11(2.05,-0.75) 12(2.05,-0.25) 13(2.05,0.25) 14(2.05,0.75) 15(2.05,1.25) 16(2.05,1.75)
  rect 1.76x2.95 smd: 17(0,0)
  silkscreen extent -2.22,-2.08 0.95,2.44, body extent -1.55,-2.05 1.55,2.05, height 1.1
"M3 PTH FOR 4.5MM HEX" [mm] "M3 plated through hole; oversized for 4.5mm hex standoffs"
  round 6.5 hole 3.5: 1(0,0)
MS511-10 [mm]
  oval 3x1 hole 0.8 slot 1.8 at 0 deg: 1(-6.35,-12.7) 1(6.35,12.7)
  Top Layer lines w1: -22.6,12.7 ccw(c-22.6,9.85) -25.45,9.85 -25.45,0 -25.45,-9.85 ccw(c-22.6,-9.85) -22.6,-12.7 22.5,-12.7 ccw(c22.5,-9.85) 25.35,-9.85 25.35,0 25.35,9.85 ccw(c22.5,9.85) 22.5,12.7 -22.6,12.7
  body extent -25.55,-12.85 25.55,12.85, height 6.51
ONSC-CP-3-318AN_A_V [mm] "SOT23, 3-Leads, Body 2.9x1.5mm, Pitch 0.95mm"
  rect 1x0.8 smd: 1(-1.2,0.95) 2(-1.2,-0.95) 3(1.2,0)
  silkscreen extent -1.33,-1.45 0.75,2.02, body extent -0.75,-1.45 0.75,1.45, height 1.31
"POLYFUSE 1812 NON-IPC BELFUSE" [mm]
  rect 1.78x3.5 smd mask+0: 1(-2.615,0) 2(2.615,0)
  silkscreen extent -1.35,-1.75 1.35,1.75, body extent -2.27,-1.62 2.27,1.62, height 0.7
PW0014A_N [mm] "SOP, 14-Leads, Body 5.1x4.5mm, Pitch 0.65mm, IPC Medium Density"
  rrect22% 1.4x0.45 smd: 1(-2.95,1.95) 2(-2.95,1.3) 3(-2.95,0.65) 4(-2.95,0) 5(-2.95,-0.65) 6(-2.95,-1.3) 7(-2.95,-1.95) 8(2.95,-1.95) 9(2.95,-1.3) 10(2.95,-0.65) 11(2.95,0) 12(2.95,0.65) 13(2.95,1.3) 14(2.95,1.95)
  silkscreen extent -3.12,-2.3 1.85,2.72, body extent -3.21,-2.5 3.21,2.5, height 1
QFN50P500X500X100_HS-33L [mm] "QFN, 32-Leads, Body 5.00x5.00mm, Pitch 0.50mm, Thermal Pad 2.10x2.10mm, IPC High Density"
  oval 0.85x0.25 smd: 1(-2.325,1.75) 2(-2.325,1.25) 3(-2.325,0.75) 4(-2.325,0.25) 5(-2.325,-0.25) 6(-2.325,-0.75) 7(-2.325,-1.25) 8(-2.325,-1.75) 17(2.325,-1.75) 18(2.325,-1.25) 19(2.325,-0.75) 20(2.325,-0.25) 21(2.325,0.25) 22(2.325,0.75) 23(2.325,1.25) 24(2.325,1.75)
  oval 0.25x0.85 smd: 9(-1.75,-2.325) 10(-1.25,-2.325) 11(-0.75,-2.325) 12(-0.25,-2.325) 13(0.25,-2.325) 14(0.75,-2.325) 15(1.25,-2.325) 16(1.75,-2.325) 25(1.75,2.325) 26(1.25,2.325) 27(0.75,2.325) 28(0.25,2.325) 29(-0.25,2.325) 30(-0.75,2.325) 31(-1.25,2.325) 32(-1.75,2.325)
  rect 2.1x2.1 smd: 33(0,0)
  silkscreen extent -3.07,-2.7 2.7,3.37, body extent -2.63,-2.63 2.63,2.63, height 1
RELAY_3-1462037-1 [mm]
  rect 2x0.7 smd paste+0 mask+0.102: 1(-3,3.8) 2(-3,0.6) 3(-3,-1.6) 4(-3,-3.8) 5(3,-3.8) 6(3,-1.6) 7(3,0.6) 8(3,3.8)
  silkscreen extent -4.6,2.33 3,5, body extent -3.75,-5 3.75,5, height 5.66
"RES 0402 IPC MID DENSITY" [mm] "Chip Resistor, 2-Leads, Body 1.00x0.50mm, IPC Medium Density"
  rect 0.6x0.55 smd: 1(-0.425,0) 2(0.425,0)
  body extent -0.53,-0.27 0.53,0.28, height 0.4
"RES 0402 NON-IPC SEI" [mm]
  rect 0.5x0.6 smd paste+0 mask+0: 1(-0.5,0) 2(0.5,0)
  body extent -0.85,-0.4 0.85,0.4, height 0.25
"RES 0603 IPC MID DENSITY" [mm]
  rrect25% 1.1x1 smd: 1(-0.85,0) 2(0.85,0)
  silkscreen extent -0.15,-0.7 0.15,0.7, body extent -0.77,-0.43 0.78,0.43, height 0.44
"RES 1206 IPC MID DENSITY" [mm] "Chip Resistor, 2-Leads, Body 3.13x1.55mm, IPC Medium Density"
  rect 1.2x1.65 smd: 1(-1.4,0) 2(1.4,0)
  body extent -1.6,-0.8 1.6,0.8, height 0.6
SAMTEC_FTSH-113-01-L-DV-EJ-K [mm]
  rect 0.74x2.79 smd: 01(-7.62,-2.035) 02(-7.62,2.035) 03(-6.35,-2.035) 04(-6.35,2.035) 05(-5.08,-2.035) 06(-5.08,2.035) 07(-3.81,-2.035) 08(-3.81,2.035) 09(-2.54,-2.035) 10(-2.54,2.035) 11(-1.27,-2.035) 12(-1.27,2.035) 13(0,-2.035) 14(0,2.035) 15(1.27,-2.035) 16(1.27,2.035) 17(2.54,-2.035) 18(2.54,2.035) 19(3.81,-2.035) 20(3.81,2.035) 21(5.08,-2.035) 22(5.08,2.035) 23(6.35,-2.035) 24(6.35,2.035) 25(7.62,-2.035) 26(7.62,2.035)
  silkscreen extent -18.81,-2.82 18.06,2.82, body extent -16.14,-2.92 16.14,2.92, height 11.18
SMB_STM [mil]
  rect 87x89 smd paste+0 mask+0: 1(-80.5,0) 2(80.5,0)
  silkscreen extent -96,-83 96,83, body extent -110,-78 110,78, height 104
"SOD-123 ONSEMI SMALL PADS" [mm]
  rect 0.9x0.95 smd paste+0 mask+0: 1(-1.68,0)
  rrect100% 0.9x0.95 smd paste+0 mask+0: 2(1.68,0)
  silkscreen extent -2.15,-0.8 1.35,1.07, body extent -1.84,-0.8 1.84,0.8, height 1.35
"SOT23-3 MID DENSITY TI" [mm] "Reference document: DBZ0003A"
  rrect16% 1.3x0.6 smd mask+0.035: 1(-1.05,0.95) 2(-1.05,-0.95) 3(1.05,0)
  silkscreen extent 0,-1.45 0.65,1.45, body extent -1.27,-1.46 1.27,1.46, height 1
"SOT23-5 HIGH DENSITY AD" [mm] "FP-UJ-5-IPC_C"
  rect 1.254x0.532 smd paste+0 mask+0: 1(-1.05,0.95)
  rrect100% 1.254x0.532 smd paste+0 mask+0: 2(-1.05,0) 3(-1.05,-0.95) 4(1.05,-0.95) 5(1.05,0.95)
  silkscreen extent -1.4,-1.7 1.4,1.75, body extent -1.4,-1.45 1.4,1.45, height 1
SOT95P245X110-3N [mm] "SOT23, 3-Leads, Body 2.90x2.45mm, Pitch 0.95mm, IPC Medium Density"
  rect 1x0.6 smd: 1(-1.2,0.95) 2(-1.2,-0.95) 3(1.2,0)
  silkscreen extent -1.85,-1.5 0.7,1.92, body extent -0.7,-1.5 0.7,1.5, height 1.1
"SOT363-6 MID DENSITY" [mm] "Technically non-IPC, adapted from TI datasheet for SOTx311 chips"
  rect 0.9x0.4 smd paste+0 mask+0: 1(-1.1,0.65)
  rrect25% 0.9x0.4 smd paste+0 mask+0: 2(-1.1,0) 3(-1.1,-0.65) 4(1.1,-0.65) 5(1.1,0) 6(1.1,0.65)
  silkscreen extent -1.17,-1.22 0.7,1.32, body extent -1.05,-1 1.05,1, height 1
SOT563 [mm]
  rect 0.6x0.35 smd: 1(-0.925,0.5) 2(-0.925,0) 3(-0.925,-0.5) 4(0.925,-0.5) 5(0.925,0) 6(0.925,0.5)
  silkscreen extent -1.05,-0.85 0.25,1.35, body extent -0.95,-0.85 0.95,0.85, height 0.6
"TESTPOINT THT" [mm]
  round 1 hole 0.5: 1(0,0)
TI-PJT32_N [mm] "QFP, 32-Leads, Body 7x7mm, Pitch 0.8mm, IPC Medium Density"
  oval 1.55x0.55 smd: 1(-4.175,2.8) 2(-4.175,2) 3(-4.175,1.2) 4(-4.175,0.4) 5(-4.175,-0.4) 6(-4.175,-1.2) 7(-4.175,-2) 8(-4.175,-2.8) 17(4.175,-2.8) 18(4.175,-2) 19(4.175,-1.2) 20(4.175,-0.4) 21(4.175,0.4) 22(4.175,1.2) 23(4.175,2) 24(4.175,2.8)
  oval 0.55x1.55 smd: 9(-2.8,-4.175) 10(-2,-4.175) 11(-1.2,-4.175) 12(-0.4,-4.175) 13(0.4,-4.175) 14(1.2,-4.175) 15(2,-4.175) 16(2.8,-4.175) 25(2.8,4.175) 26(2,4.175) 27(1.2,4.175) 28(0.4,4.175) 29(-0.4,4.175) 30(-1.2,4.175) 31(-2,4.175) 32(-2.8,4.175)
  silkscreen extent -3,-3 3,2.25, body extent -3.5,-3.5 3.5,3.5, height 1.2
USB_MINIB_RIGHTANGLE [mm]
  round 1.2 hole 0.75: 1(-1.6,5.05) 2(-0.8,3.85) 3(0,5.05) 4(0.8,3.85) 5(1.6,5.05)
  oval 1.258x2.516 hole 0.75 slot 1.95 at 90 deg: 6(-3.65,0) 6(3.65,0)
  silkscreen extent -3.85,1.58 3.85,5.65, body extent -3.97,-3.75 3.93,5.65, height 3.91

## Part data
C1 C2 C3 C6 C7 C11 C12 C13 C17 C18: library part CAP, "Wurth Elektronik 885012008037 - Cap Ceramic 10pF 5% 50V NP0 1206", MF="Wurth Elektronik", MP=885012008037
C4 C5 C10 C14 C15 C16: library part CAP, "Murata GRT188R61H105KE13D - Cap MLCC AEC-Q200 X5R 1uF 50V 0603", MF=Murata, MP=GRT188R61H105KE13D
C8 C9 C19 C29 C30 C31 C34 C37 C38 C50A C50B: library part CAP, "Kemet C0603C104K5RACAUTO - Cap Ceramic 0.1uF 50V X7R 10% 0603 125C Paper T/R", MP=C0603C104K5RACAUTO
  C8 C9 C19 C50A C50B: MF=Kemet
  C29 C30 C31 C34 C37 C38: MF=KEMET
C20 C21 C24: library part CAP, "Murata GRM21BR61H106KE43L", MF=Murata, MP="Murata GRM21BR61H106KE43L"
C22 C23 C25 C26 C27 C28: library part CAP, "Murata GCM1885C1H202FA16J 50V 2nF C0G ±1% 0603", MF=Murata, MP=GCM1885C1H202FA16J
C32 C33 C35 C36 C39 C40 C41 C42 C43 C44 C45 C51A C51B: library part CAP, "Murata GRM21BR61E106KA73L - Cap Ceramic 10uF 10% 25V X5R 0805", MF=Murata, MP=GRM21BR61E106KA73L
C46 C47 C48 C49: library part CAP, "CL31B225KBHNNNE CAP CER 2.2UF 50V X7R 1206", MF="Samsung Electro-Mechanics", MP=CL31B225KBHNNNE
C52A C52B C53A C53B: library part CAP, "Murata GRT188R61H105KE13D - Cap Ceramic 1uF 10% 50V X5R 0603 (Placeholder)", MF=Murata, MP=GRT188R61H105KE13D
CX1A CX1B CX2A CX2B: library part CAP, "Yageo CC1206FRNPO9BN271 - Cap Ceramic 270pF 1% C0G/NP0 50V SMD 1206", MF=YAGEO, MP=CC1206FRNPO9BN271
D1: library part Zener, "Vishay SMAJ12A-M3/61 - TVS Diode 12V Standoff 13.3V Breakdown DO-214AC", MF="Vishay General Semiconductor", MP=SMAJ12A-M3/61
D2 D4: library part LED-blue, "LED RED CLEAR 0603 SMD", Case Code (Imperial)=0603, Case Code (Metric)=1608, Color=Blue, Forward Current=30mA, Forward Voltage=3.2V, Max Operating Temperature=85°C, Min Operating Temperature=-40°C, Package Quantity=4000, Supplier Part Number 1=732-4966-1-ND, Test Current=20mA, Case/Package=0603, Category=LEDs, ComponentLink1Description=https://datasheet.ciiva.com/29563/150060bs75000-29563034.pdf?src-supplier=Digi-Key, ComponentLink1URL=https://datasheet.ciiva.com/29563/150060bs75000-29563034.pdf?src-supplier=Digi-Key, ComponentLink2Description=https://datasheet.ciiva.com/29279/759426-da-01-en-chipled-0603-w-kl-blau-150060bs75000-29279193.pdf?src-supplier=Conrad, ComponentLink2URL=https://datasheet.ciiva.com/29279/759426-da-01-en-chipled-0603-w-kl-blau-150060bs75000-29279193.pdf?src-supplier=Conrad, ComponentLink3Description=https://datasheet.ciiva.com/29563/150060bs75000-29563035.pdf?src-supplier=Digi-Key, ComponentLink3URL=https://datasheet.ciiva.com/29563/150060bs75000-29563035.pdf?src-supplier=Digi-Key, ComponentLink4Description=https://datasheet.ciiva.com/29563/150060bs75000-29563036.pdf?src-supplier=Digi-Key, ComponentLink4URL=https://datasheet.ciiva.com/29563/150060bs75000-29563036.pdf?src-supplier=Digi-Key, ComponentLink5Description=https://datasheet.ciiva.com/22656/1911343-22656939.pdf?src-supplier=Element14, ComponentLink5URL=https://datasheet.ciiva.com/22656/1911343-22656939.pdf?src-supplier=Element14, ComponentLink6Description=https://datasheet.ciiva.com/48430/150060bs75000-eng-tds-48430039.pdf?src-supplier=Distrelec, ComponentLink6URL=https://datasheet.ciiva.com/48430/150060bs75000-eng-tds-48430039.pdf?src-supplier=Distrelec, Dominant Wavelength=470nm, Height=0.7mm, Length=1.6mm, Lens Style=Clear,Rectangular, Luminous Intensity=145mcd, MF="Wurth Electronics", Mount="Surface Mount", MP=150060RS75000, Packaging="Cut Tape", REACH SVHC=Unknown, RoHS=Yes, Stock 1=66561, Supplier 1=Digi-Key, Viewing Angle=140°, Wavelength=470nm, Width=0.8mm
D3: "600 W, 3.3 V TVS in SMB", Manufacturer_Name=STMicroelectronics, Copyright="Copyright (C) 2025 Ultra Librarian. All rights reserved.", Manufacturer_Part_Number=SMLVT3V3, RefDes=Refdes
D5A D5B: library part Zener, "DIODE ZENER SOD123", MF=onsemi, MP=MMSZ4679T1G
F1 F2: library part Polyfuse, "Bel Fuse 0ZCG0030FF2C - Polymeric PTC Resettable Fuse 30V 300mA hold 600mA trip SMD 1812", MF="Bel Fuse Inc.", MP=0ZCG0030FF2C
H1 H2 H3 H4 SH1: "(Plated) Mounting hole"
J1: Package=None, Availability=Unavailable, MP=FTSH-113-01-L-DV-EJ-K, Price=None
J2A J2B: "Conn Mini-USB RCP 5 POS Solder ST Thru-Hole 5 Terminal 1 Port", Color=Black, Flammability Rating="UL94 V-0", Supplier Part Number 1=UE25BE5510H-ND, Category="USB Connectors", ComponentLink1Description=http://components.arrow.com/part/dataview/0323_00956300?src-supplier=Arrow+Europe, ComponentLink1URL=http://components.arrow.com/part/dataview/0323_00956300?src-supplier=Arrow+Europe, ComponentLink2Description=http://www.alliedelec.com/m/d/e7e3d7a920045eebbdef787e60d8b001.pdf?src-supplier=Allied+Electronics, ComponentLink2URL=http://www.alliedelec.com/m/d/e7e3d7a920045eebbdef787e60d8b001.pdf?src-supplier=Allied+Electronics, ComponentLink3Description=https://www.amphenolcanada.com/ProductSearch/drawings/AC/UE25BEX510X.pdf?src-supplier=Digi-Key, ComponentLink3URL=https://www.amphenolcanada.com/ProductSearch/drawings/AC/UE25BEX510X.pdf?src-supplier=Digi-Key, Contact Material="Copper Alloy", Contact Plating=Gold, Features="High Temperature", Gender=Female, Lead Free="Lead Free", MF="Amphenol Commercial", Mount="Through Hole", MP=UE25BE5510H, Number of Contacts=5, Number of Positions=5, RoHS=Yes, Stock 1=6446, Supplier 1=Digi-Key, Termination=PCB
K1: "RelÃ© RF, CC, biestable, 1 bobina, 2 conectores DPDT-CO de forma C, capacidad de contacto de 2 A, voltaje de bobina de 4,5 V CC, voltaje de contacto de 250 V CA, Axicom IM", Package=None, Check_prices=https://www.snapeda.com/parts/3-1462037-1/TE+Connectivity+Potter+%2526+Brumfield+Relays/view-part/?ref=eda, EU_RoHS_Compliance=Compliant, MF="TE Connectivity", MP=3-1462037-1, SnapEDA_Link=https://www.snapeda.com/parts/3-1462037-1/TE+Connectivity+Potter+%2526+Brumfield+Relays/view-part/?ref=snap
Q1 Q2 Q3 Q4: library part CMP-1062-00010-1, "N-Channel JFET, 15 V, 10 to 20 mA, 35 mS, 3-Pin CP, Pb-Free, Tape and Reel", Manufacturer="On Semiconductor", Channel Polarity="N Channel", ComponentLink1Description="Manufacturer URL", ComponentLink1URL=http://www.onsemi.com/, ComponentLink2Description=Datasheet, ComponentLink2URL=http://www.onsemi.com/pub_link/Collateral/2SK3557-D.PDF, ComponentLink3Description="Package Specification", ComponentLink3URL=http://www.onsemi.com/pub_link/Collateral/EN6619-D.PDF, IDSS Max (uA)=20000, IDSS Min (uA)=10000, Mounting Technology="Surface Mount", PackageDescription="3-Pin Small Outline Transistor, Body 2.9 x 1.5 mm, Pitch 0.95 mm", PackageReference=CP-3-318AN_A, Packing="Tape and Reel", PartNumber=2SK3557-6-TB-E, RoHS=Pb-Free
Q5: library part CMP-07173-000101-1, "MOSFET N-CH 50V 220MA SOT-23", Case/Package=SOT-23, Continuous Drain Current (ID)=220mA, Drain to Source Breakdown Voltage=50V, Drain to Source Resistance=3.5R, Gate to Source Voltage (Vgs)=20V, Input Capacitance=27pF, Max Operating Temperature=150°C, Max Power Dissipation=360mW, Min Operating Temperature=-55°C, On-State Resistance=6R, Package Quantity=1, Threshold Voltage=1.3V, Contact Plating=Tin, Current Rating=220mA, Drain to Source Voltage (Vdss)=50V, Dual Supply Voltage=50V, Element Configuration=Single, Fall Time=9ns, Height=0.93mm, Lead Free="Lead Free", Length=2.92mm, Mount="Surface Mount", Nominal Vgs=1.3V, Number of Elements=1, Number of Pins=3, Packaging="Tape and Reel", Power Dissipation=360mW, Radiation Hardening=No, Rds On Max=3.5R, REACH SVHC="No SVHC", Rise Time=9ns, Termination=SMD/SMT, Turn-Off Delay Time=20ns, Turn-On Delay Time=2.5ns, Voltage Rating (DC)=50V, Weight=0.03g, Width=1.3mm
R1 R2 R3 R4 R5 R6 R7 R8 R9 R10 R11 R12 R13 R14 R15 R16 R17 R18 R19 R20 R21 R22 R23 R24 R25 R26: library part RES, "Vishay TNPV12061M00BYEN - Res 1MOhm 0.1% 1/4W SMD 1206", MF="Vishay Dale", MP=TNPV12061M00BYEN
R27 R46: library part RES, "Vishay CRCW060310K0FKEA SMD 0603 10k, CRCW e3 Series, 75V, thick film, 100mW", MF="Vishay Dale", MP=CRCW060310K0FKEA
R28 R30 R32 R33 R34 R35 R47 R49: library part RES, "Panasonic ERJ-3EKF2001V Res Thick Film 0603 2K Ohm 1% 1/10W ±100ppm/°C", MF="Panasonic Electronic Components", MP=ERJ-3EKF2001V
R29 R31 R43 R44 R45: library part RES, "Stackpole RMCF0402JT47R0 - Res 47Ohm 5% 0.063W 0402 Thick Film AEC-Q200 compliant", MF="Stackpole Electronics Inc.", MP=RMCF0402JT47R0
R36 R37: library part RES, "Res, Any, Manually select footprint", MF="Panasonic Industry", MP=ERJ-3AEB103V
R38: library part RES, MF="Panasonic Electronic Components", MP=ERJ-U03F1001V
R39 R40 R41: library part RES, "Panasonic ERJ-U03F1001V - Res SMD 1 kOhm 1% 1/10W 0603", MF="Panasonic Electronic Components", MP=ERJ-U03F1001V
R42 R48 R50: library part RES, "-55℃~+155℃ 100kΩ 100mW 75V Thick Film Resistor ±1% ±100ppm/℃ 0603 Chip Resistor - Surface Mount ROHS", MF="UNI-ROYAL(Uniroyal Elec)", MP=0603WAF1003T5E
R51A R51B R52A R52B R53 R54A R54B: library part RES, "Yageo RC0402JR-070RL - Res 0 Ohms 1/16W SMD 0402", MF=YAGEO, MP=RC0402JR-070RL
RT1: library part "THERM_RES NTC 0603 10K 1%", "THERMISTOR NTC 10KOHM 3380K 0603", Case Code (Imperial)=0603, Case Code (Metric)=1608, Max Operating Temperature=125°C, Min Operating Temperature=-40°C, Supplier Part Number 1=490-16279-1-ND, Case/Package=0603, Category=Thermistors, ComponentLink1Description=http://www.farnell.com/datasheets/2095755.pdf?src-supplier=Farnell, ComponentLink1URL=http://www.farnell.com/datasheets/2095755.pdf?src-supplier=Farnell, ComponentLink2Description=https://www.murata.com/en-us/products/productdata/8796836233246/L0770E.pdf?src-supplier=Digi-Key, ComponentLink2URL=https://www.murata.com/en-us/products/productdata/8796836233246/L0770E.pdf?src-supplier=Digi-Key, ComponentLink3Description=http://www.farnell.com/datasheets/2095755.pdf?src-supplier=Element14, ComponentLink3URL=http://www.farnell.com/datasheets/2095755.pdf?src-supplier=Element14, MF=Murata, MP=NCU18XH103F60RB, REACH SVHC="No SVHC", RoHS=No, Stock 1=48580, Supplier 1=Digi-Key
U1 U2 U3: library part CMP-0272-01663-3, "11 MHz, Single Supply, Low Noise, Precision, Rail-to-Rail Output, JFET Amplifier, 4.5 to 36 V, -40 to 125 degC, 14-pin SOP (PW14), Green (RoHS & no Sb/Br)", Manufacturer="Texas Instruments", Rating=Catalog, Total Supply Voltage(Max)(+5V is 5, +/-5V is 10)=36, Total Supply Voltage(Min)(+5V is 5, +/-5V is 10)=4.5, CMRR(Min)(dB)=126, Code_JEDEC=MO-153, ComponentLink1Description="Manufacturer URL", ComponentLink1URL=http://www.ti.com/, ComponentLink2Description=Datasheet, ComponentLink2URL=http://www.ti.com/lit/ds/symlink/opa4140.pdf, ComponentLink3Description="Package Specification", ComponentLink3URL=http://www.ti.com/litv/pdf/mpds360, DatasheetVersion=SBOS498A, Eco-Plan="Green (RoHS & no Sb/Br)", GBW(Typ)(MHz)=11, IIB(Max)(pA)=10, Iq per channel(Max)(mA)=2, Mounting Technology="Surface Mount", Number of Channels=4, Offset Drift(Typ)(uV/C)=0.35, PackageDescription="14-Pin Plastic Small Outline, Body 5 x 4.4 mm, Pitch 0.65 mm", PackageReference=PW0014A, PackageVersion="4040064-3/G, 02/2011", Packing=BULK, PartNumber=OPA4140AIPW, Slew Rate(Typ)(V/us)=20, Sub Family="High Supply Voltage Amplifier (>=30V), Low Input Bias Current Amp (<=10pA), Low Noise Amp (<=10nV/rtHz), Low Offset Voltage Amplifier (<=500uV), Precision Amplifier", Vio (25C)(Max)(mV)=0.12
U4: "Bipolar Motor Driver NMOS PWM SOT-563"
U5: "24BIT ADC Delta-Sigma 4k samples/s PGA V-reference", Case/Package=LQFP, Manufacturer 1="Texas Instruments", Manufacturer Part Number 1=ADS124S08IPBSR, Max Operating Temperature=125°C, Min Operating Temperature=-50°C, Supplier Part Number 1=296-45170-1-ND, Category="Analog to Digital Converters (ADCs)", ComponentLink1Description=http://www.ti.com/general/docs/lit/getliterature.tsp?genericPartNumber=ADS124S08&fileType=pdf&src-supplier=Farnell, ComponentLink1URL=http://www.ti.com/general/docs/lit/getliterature.tsp?genericPartNumber=ADS124S08&fileType=pdf&src-supplier=Farnell, ComponentLink2Description=http://www.ti.com/lit/ds/symlink/ads124s06.pdf?src-supplier=Digi-Key, ComponentLink2URL=http://www.ti.com/lit/ds/symlink/ads124s06.pdf?src-supplier=Digi-Key, Interface=SPI, Mount="Surface Mount", Number of A/D Converters=1, Number of Bits=24, Number of Inputs=12, Number of Pins=32, Packaging="Tape and Reel", RoHS=No, Sampling Rate=4000S/s, Stock 1=2523, Supplier 1=Digi-Key
U6: library part CMP-0003-01894-1, "Dual Current Input 20-Bit ADC, 0 to 70 degC, 32-pin QFP (PJT32), Green (RoHS & no Sb/Br)", Analog Voltage AV/DD(Max)(V)=5.25, Analog Voltage AV/DD(Min)(V)=4.75, Manufacturer="Texas Instruments", # Input Channels=2, Architecture=Delta-Sigma, Code_JEDEC=MS-026, ComponentLink1Description="Manufacturer URL", ComponentLink1URL=http://www.ti.com/, ComponentLink2Description=Datasheet, ComponentLink2URL=http://www.ti.com/general/docs/lit/getliterature.tsp?genericPartNumber=DDC112&fileType=pdf, ComponentLink3Description="Package Specification", ComponentLink3URL=http://www.ti.com/litv/pdf/mpqf112, DatasheetVersion=SBAS085B, Digital Supply(Max)(V)=5.25, Digital Supply(Min)(V)=4.75, Eco-Plan="Green (RoHS & no Sb/Br)", Mounting Technology="Surface Mount", PackageDescription="32-Pin Plastic Quad Flatpack, Body 7 x 7 mm, Pitch 0.8 mm", PackageReference=PJT32, PackageVersion="4203540/A, 11/2001", PartNumber=DDC112YK/250G4, Resolution(Bits)=20, Sample Rate (max)(SPS)=3k, SubFamily="Current Input ADC"
U7: library part OPA350EA, "High-Speed Single-Supply Rail-to-Rail Op Amp, MicroAmplifier Series, 8VSSOP", MF="Texas Instruments", MP=OPA350EA/2K5
U8: library part REF3040EAIDBZR, "Low-Drift Low-Power Series Voltage Reference 4.096V SOT23-3", MF="Texas Instruments", MP=REF3040EAIDBZR
U9: "Octal Bus Transceiver and 3.3V to 5V Shifter with Tri-State Outputs 24TSSOP", MF="Texas Instruments", MP=SN74LVC4245APWR
U10: "Dual-Bit Dual-Supply Bus Transceiver With Configurable Voltage Translation 8VSSOP", MF="Texas Instruments", MP=SN74LVC2T45DCUR
U11: library part PMOS, "MOSFET P-CH 30V 5A SOT23-3", MF="Vishay Siliconix", MP=SI2347DS-T1-GE3, Supplier 1=Avnet, Supplier Part Number 1=SI2347DS-T1-GE3
U12: library part PMOS_LV, "P-Channel 30 V 6A (Ta) 1W (Ta) Surface Mount SOT-23F", Supplier Part Number 1=SI2347DS-T1-GE3, MF=Toshiba, MP=SSM3J332R,LF, Supplier 1=Avnet
U13: library part CMP-0475-00262-1, "Low Noise Dual Supply Inverting Charge Pump, 4.5 to 32 V Vin, Adjustable Vout, 16-pin SOP (MSE-16-EDP), -50 to 150 degC, Pb-Free, Tape and Reel", Frequency(kHz)=500, Manufacturer="Linear Technology", ComponentLink1Description="Manufacturer URL", ComponentLink1URL=http://www.linear.com/, ComponentLink2Description=Datasheet, ComponentLink2URL=http://cds.linear.com/docs/en/datasheet/3260fa.pdf, ComponentLink3Description="Package Specification", ComponentLink3URL=http://cds.linear.com/docs/en/packaging/05081667_F_MSE16.pdf, DatasheetVersion="Rev. A", Ishutdown(uA)=2, Isupply(mA)=0.1, Max Iout(mA)=100, Mounting Technology="Surface Mount", PackageDescription="16-Pin Plastic MSOP, Exposed Die Pad, Body 4.039 x 3 mm, Pitch 0.5 mm", PackageReference=MSE-16, PackageVersion="Rev. F, 05/2013", Packing="Tape and Reel", PartNumber=LTC3260MPMSE#TRPBF, RoHS=TRUE, Vin Max(V)=32, Vin Min(V)=4.5, Voutput=Adj
U14 U15: library part ADP7142AUJZ-R7, "1.2-40V 200mA Low Noise CMOS LDO Adjustable Linear Regulator TSOT23", Ambient Temperature Range High=+125°C, Ambient Temperature Range Low=-40°C, Dropout Voltage=200mV, Manufacturer="Analog Devices", Max Junction Temp=+150°C, Max Supply Voltage=40V, Min Supply Voltage=2.7V, Nominal Supply Current=50-180uA, Output Current=200mA, Output Voltage=1.2-5V, Package=UJ-5, Temperature="-40°C to +125°C", Accuracy Percentage=0.8%, Automotive=No, Category=IC, ComponentLink2Description=Datasheet, ComponentLink2URL=https://www.analog.com/media/en/technical-documentation/data-sheets/ADP7142.pdf, Device Class L1="Integrated Circuits (ICs)", Device Class L2="Power Management ICs", Device Class L3="Voltage Regulators - Linear", Digikey Description="IC REG LIN POS ADJ 200MA TSOT23", Height=1mm, Lead Free=Yes, Manufacturer Part Number=ADP7142AUJZ-R7, MF="Analog Devices", Mouser Description="LDO Regulator Pos 1.5V to 5V 0.2A 5-Pin TSOT-23 T/R", MP=ADP7142AUJZ-5.0-R7, Number of Outputs=1, Octopart=https://octopart.com/adp7142aujz-r7-analog+devices-38928114, Output Type=AdjustableProgrammable, RoHS=TRUE, Temperature Range High=+125°C, Temperature Range Low=-40°C
U16A U16B: "DAC 8bit 1 channel SPI Supply Reference Buffered Voltage", MF="Texas Instruments", MP=DAC5311IDCKR
Y1: "MEMS OSC XO 4.096MHZ H/LVCMOS", Case/Package=SMD/SMT, Max Supply Current=4.5mA, Height=0.032inch, MF=SiTime, Mount="Surface Mount", MP=SiT1602BC-21-XXN-4.096000, RoHS Compliant=Yes, Series=SIT1602, Width=0.098inch

## Via types
v1: diameter 0.6, hole 0.3, Top Layer to Bottom Layer, tented both sides, 305 vias
v2: diameter 0.8, hole 0.5, Top Layer to Bottom Layer, 59 vias
v3: diameter 0.6, hole 0.3, Top Layer to Bottom Layer, 7 vias

## Nets (pads, with @x,y where several pads share a name; then routed paths per layer and width w, separated by ;. In a path a pad name is that pad's centre, name@x,y a point inside that pad or via, vN(x,y) a via of type N, cw(c..) or ccw(c..) an arc to the next point about the centre after c; other vN are vias at no path point)
3V3: C19.2 C20.2 C34.1 C37.1 R27.2 R40.2 R46.1 U5.15 U5.16 U9.23 U9.24 U10.1 U12.2 Y1.4 | length 58.9
  Top Layer w0.254: R27.2@36.446,36.5 40.296,36.5 Y1.4@40.446,36.65 ; U10.1@42.722,20.5 42.596,20.5 42.049,19.953 41.332,19.953 40.953,20.332 40.953,28.868 42.038,29.953 42.868,29.953 43.019,30.104 43.854,30.104 U9.23@44,30.25 ; U5.16@43.002,41.627 43.1,41.529 ; U9.23@43.539,30.219 43.539,30.727 43.637,30.825 U9.24@44.15,30.825 C34.1@44.15,32 ; U9.24@44.737,30.887 44.773,30.923 44.898,30.923 44.947,30.972 47.297,30.972 47.446,30.823 47.446,28.468 47.778,28.136 47.778,27.872 R40.2@48.15,27.5 ; v1(50.819,36.836) 50.819,38.819 U12.2@51.95,39.95
  Top Layer w0.5: Y1.4@40.446,36.65 Y1.4@40.546,36.65 ; U5.15@42.625,41.75 42.807,41.75 43.1,41.457 C20.2@43.1,40 42.775,39.675 42.775,38.879 Y1.4@40.546,36.65 ; U10.1@43,20.496 43.004,20.496 43.25,20.25 43.6,20.25 C37.1@43.6,18.75 ; U9.23@44.15,30.175 44.125,30.2 44.125,31.975 C34.1@44.1,32 44.1,33.267 ; R46.1@45.9,33.25 45.883,33.267 44.1,33.267 ; Y1.4@40.546,36.65 41.569,35.627 41.569,33.994 41.998,33.565 v1(44.398,33.565) 44.1,33.267
  Bottom Layer w0.254: v1(44.398,33.565) 44.398,33.659 44.677,33.937 44.677,34.07 44.856,34.25 48.233,34.25 v1(50.819,36.836)
\DRDY: J1.16 R31.2 | length 36.3
  Top Layer w0.127: v1(41.75,39.048) R31.2@41.75,39.75
  Top Layer w0.254: v1(59.5,24.75) 59.52,24.73 J1.16@61.535,24.73
  Bottom Layer w0.254: v1(41.75,39.048) 41.75,33.503 45.064,30.189 45.274,30.189 45.732,30.647 46.268,30.647 48.665,28.25 51.835,28.25 54.982,31.397 55.518,31.397 55.897,31.018 55.897,26.305 55.934,26.268 55.934,25.732 55.897,25.695 55.897,24.899 56.046,24.75 v1(59.5,24.75)
\SPI_CS_ADC: J1.20 U5.9 | length 45.4
  Top Layer w0.127: v1(39.11,38.526) 39.066,38.57 39.066,38.922 38.979,39.008 38.979,39.492 39.11,39.622 39.11,40.723 39.5,41.113 U5.9@39.5,41.925
  Top Layer w0.254: v1(59.5,22.25) 59.56,22.19 J1.20@61.535,22.19
  Bottom Layer w0.254: v1(39.11,38.526) 39.11,24.686 44.678,19.118 58.533,19.118 60.147,20.732 60.147,21.603 v1(59.5,22.25)
\SYS_RESET: J1.06 R45.1 | length 13.5
  Top Layer w0.254: R45.1@49.75,33.25 49.795,33.295 50.408,33.295 v1(50.452,33.34) ; v1(59.5,31) 59.54,31.04 61.495,31.04 J1.06@61.535,31.08
  Bottom Layer w0.254: v1@50.5,33.25 50.523,33.273 50.612,33.273 50.636,33.25 53.938,33.25 54.329,32.859 54.359,32.859 55.25,33.75 56.75,33.75 v1(59.5,31)
ADC_RESET: R45.2 R46.2 U5.18 | length 14.6
  Top Layer w0.254: U5.18@43.575,43 43.871,43 43.99,42.881 44.03,42.881 45.729,41.182 45.729,39.03 44.865,38.166 44.865,34.66 45.406,34.119 47.351,34.119 47.5,33.97 R46.2@47.5,33.25 ; R46.2@47.6,33.25 48.627,33.25 R45.2@48.627,33.125
AVDD: C4.2 C10.2 C15.2 C29.2 C31.2 C33.1 C48.1 C50A.2 C50B.2 C51A.2 C51B.2 TP10.1 U1.4 U2.4 U3.4 U6.3 U7.7 U8.1 U15.4 U15.5 U16A.4 U16B.4 | length 60.3